# EAGLE board 14043-sparkfun-mlx90640-qwiic-breakout-Panel (EAGLE 9.1.0), part 1 of 3
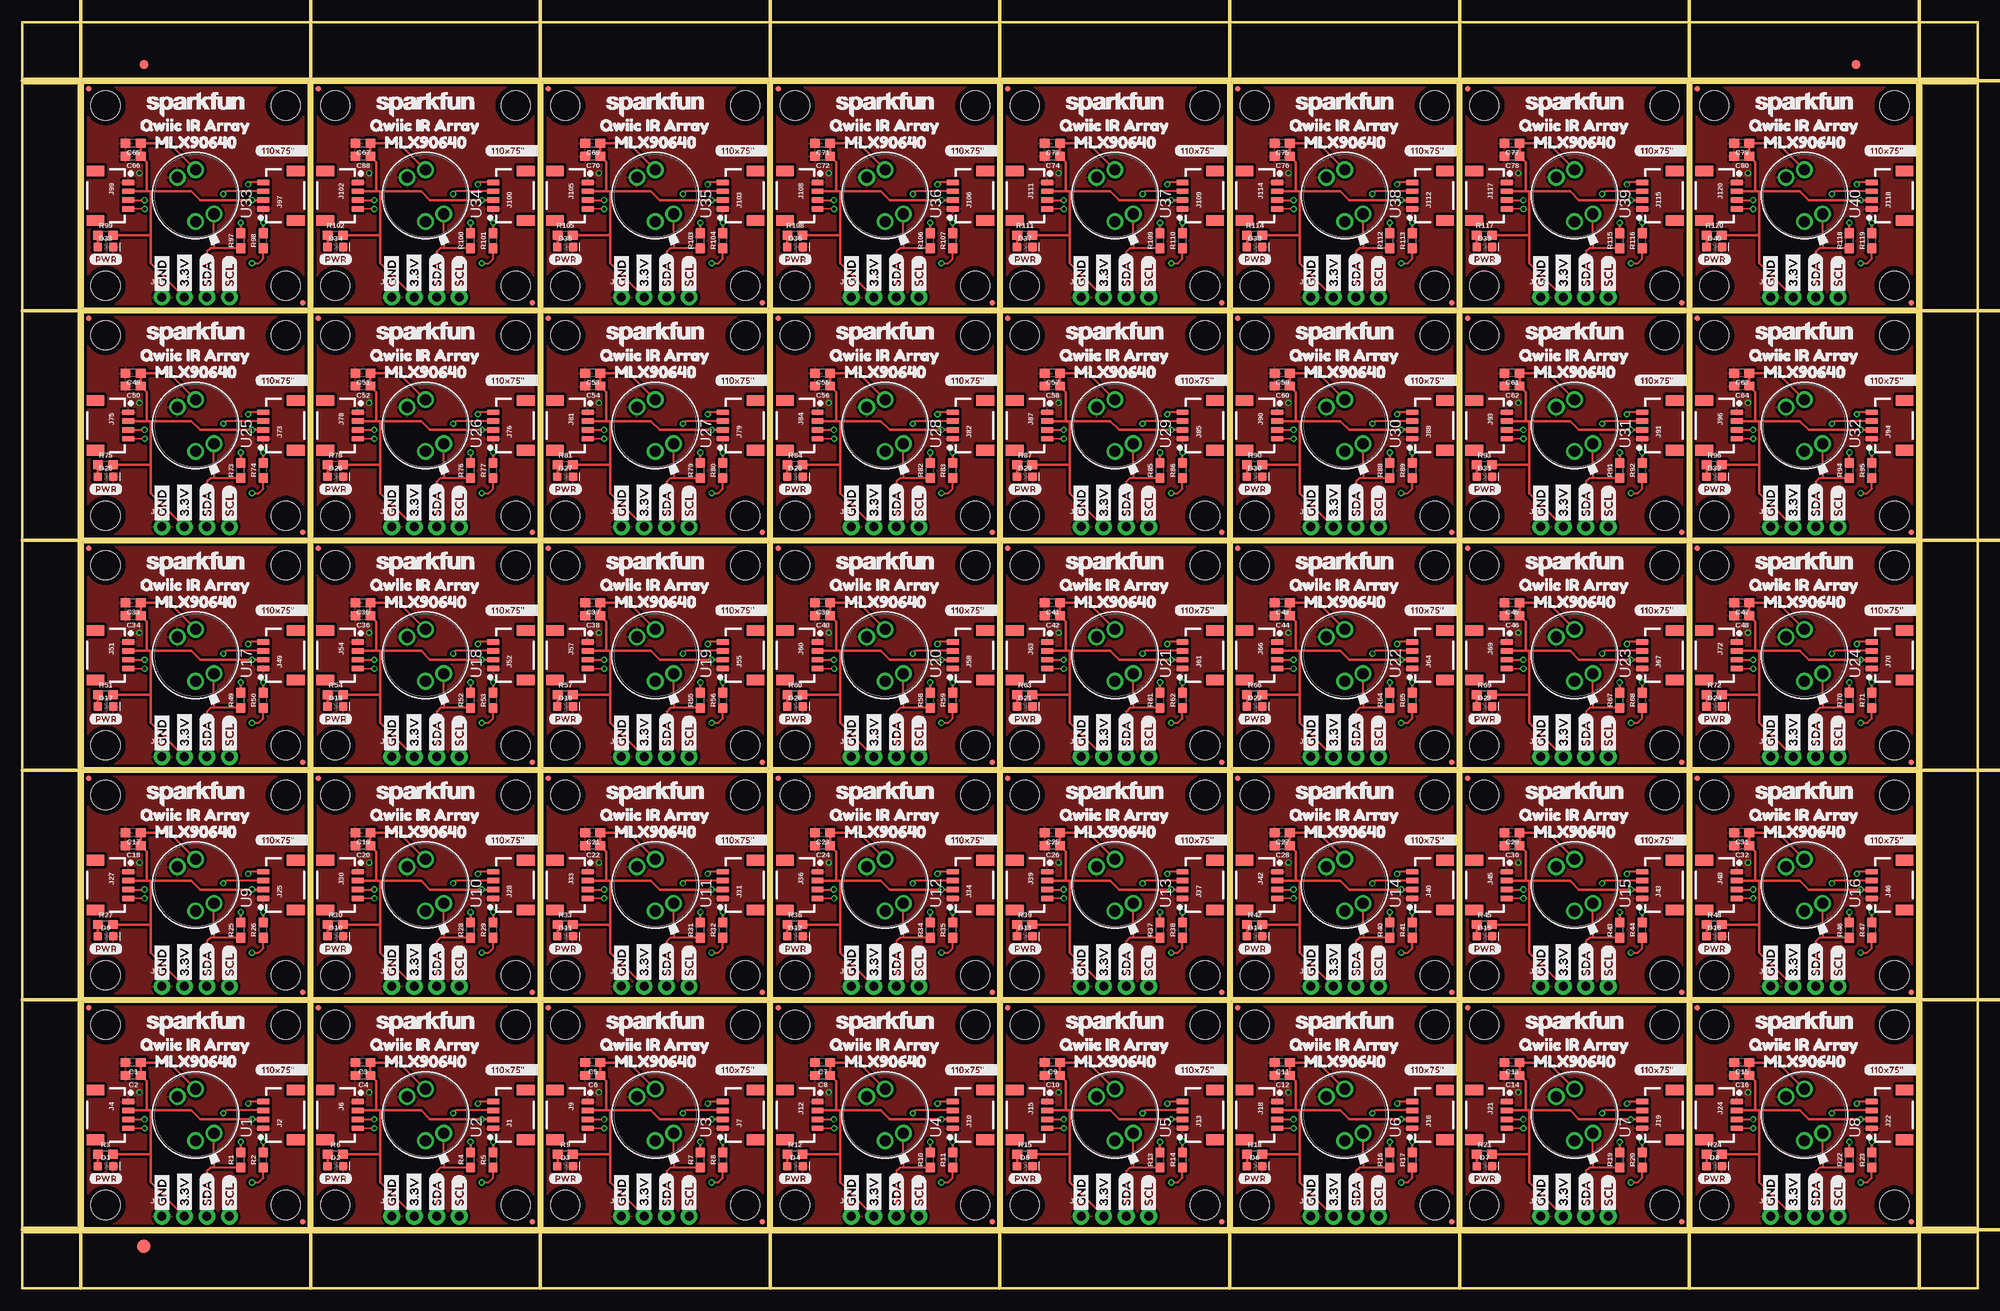
[diagram p0: board, top side]
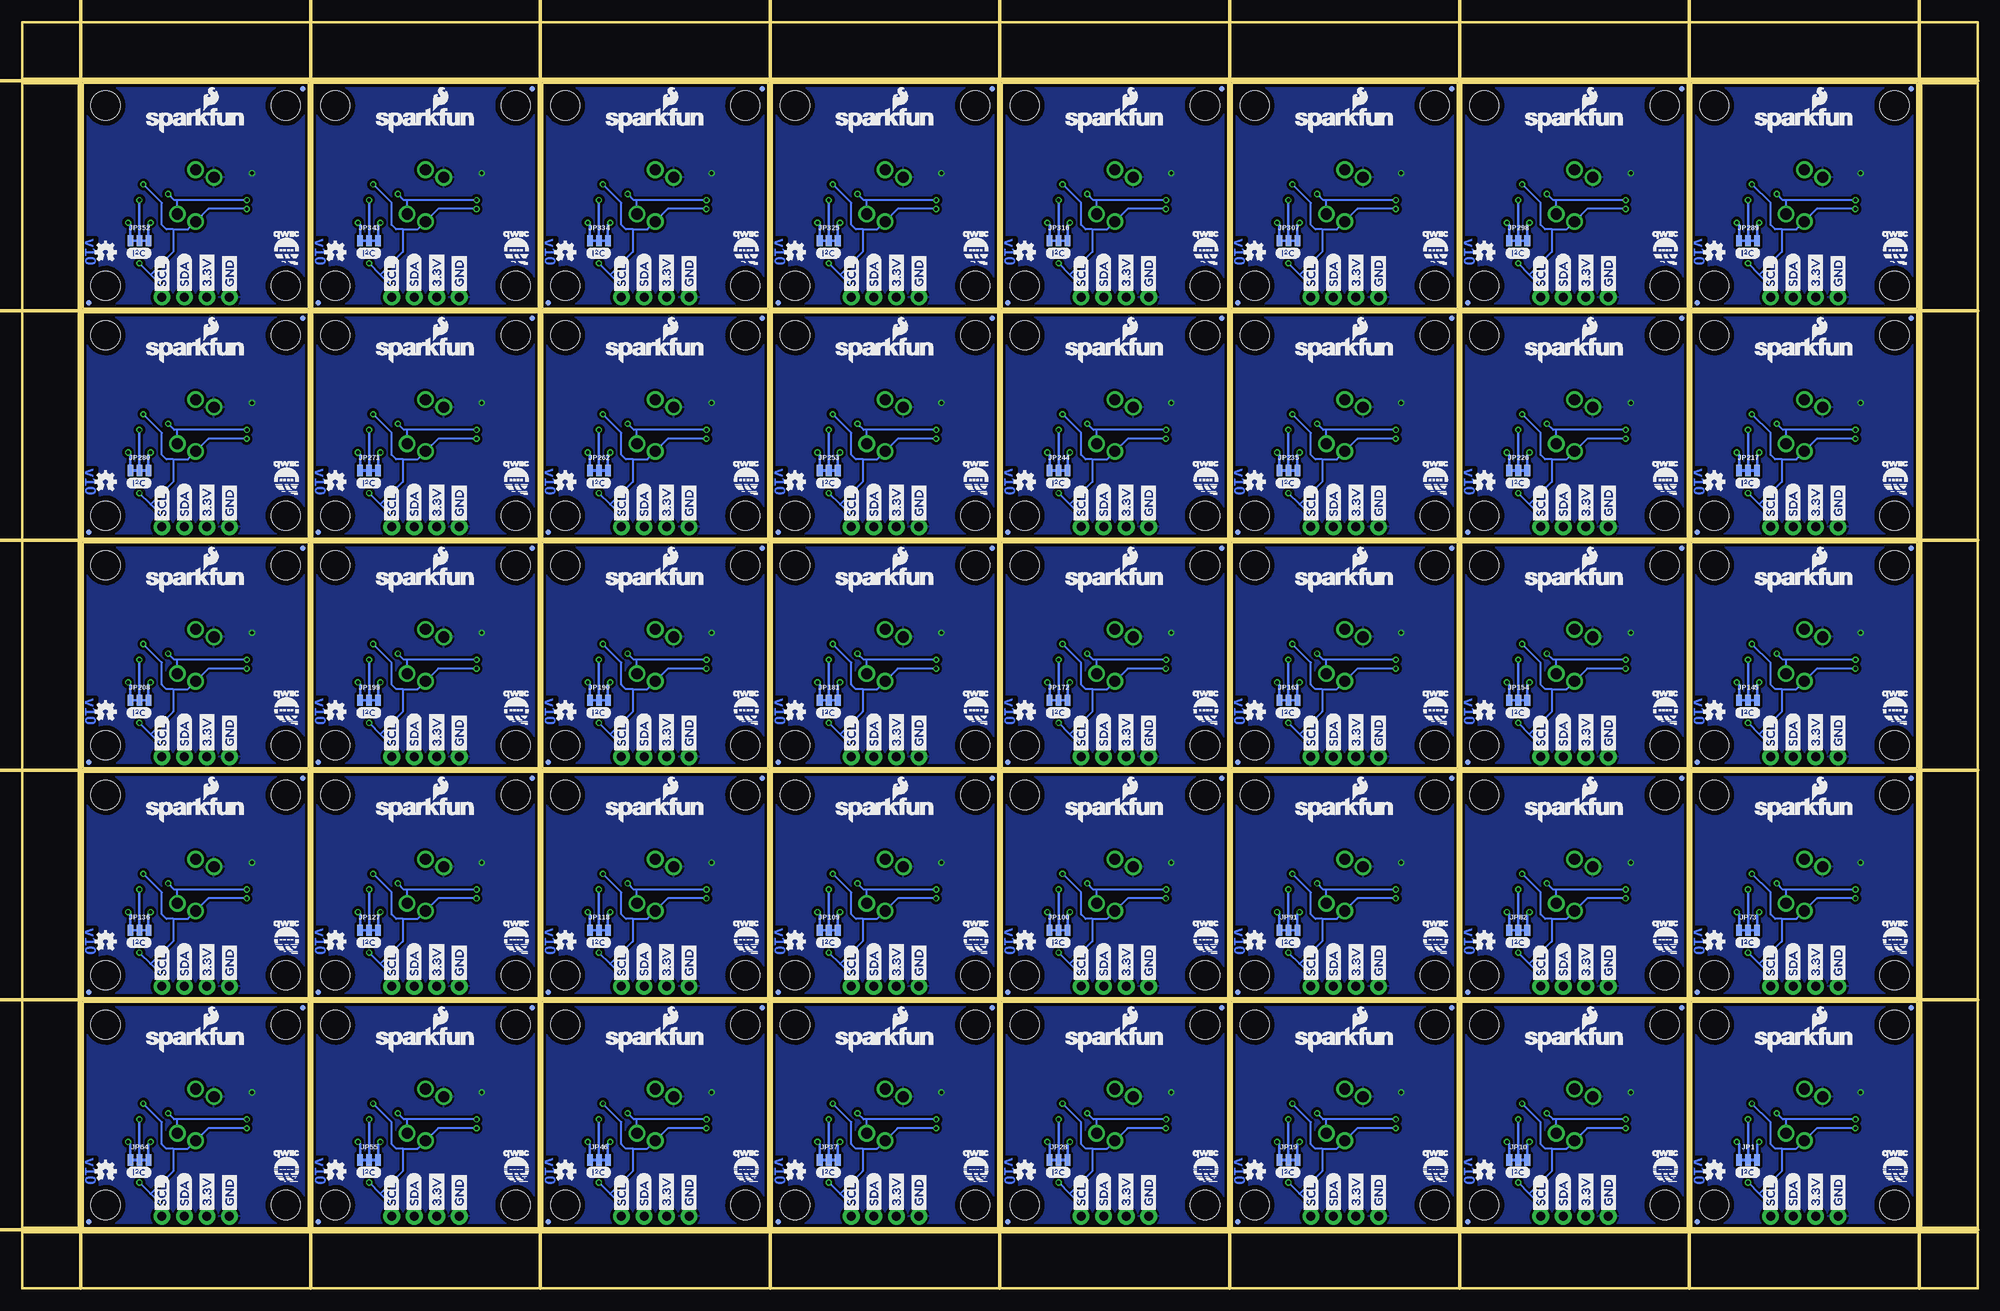
[diagram p1: board, bottom side, seen from below]

Size 220.47 x 142.75 mm. Coordinates in mm from the lower left corner, seen from the top.
Outline: 6.86,6.86 32.26,6.86 32.26,32.26 6.86,32.26 6.86,6.86
Outline: 32.77,6.86 58.17,6.86 58.17,32.26 32.77,32.26 32.77,6.86
Outline: 58.67,6.86 84.07,6.86 84.07,32.26 58.67,32.26 58.67,6.86
Outline: 84.58,6.86 109.98,6.86 109.98,32.26 84.58,32.26 84.58,6.86
Outline: 110.49,6.86 135.89,6.86 135.89,32.26 110.49,32.26 110.49,6.86
Outline: 136.4,6.86 161.8,6.86 161.8,32.26 136.4,32.26 136.4,6.86
Outline: 162.31,6.86 187.71,6.86 187.71,32.26 162.31,32.26 162.31,6.86
Outline: 188.21,6.86 213.61,6.86 213.61,32.26 188.21,32.26 188.21,6.86
Outline: 6.86,32.77 32.26,32.77 32.26,58.17 6.86,58.17 6.86,32.77
Outline: 32.77,32.77 58.17,32.77 58.17,58.17 32.77,58.17 32.77,32.77
Outline: 58.67,32.77 84.07,32.77 84.07,58.17 58.67,58.17 58.67,32.77
Outline: 84.58,32.77 109.98,32.77 109.98,58.17 84.58,58.17 84.58,32.77
Outline: 110.49,32.77 135.89,32.77 135.89,58.17 110.49,58.17 110.49,32.77
Outline: 136.4,32.77 161.8,32.77 161.8,58.17 136.4,58.17 136.4,32.77
Outline: 162.31,32.77 187.71,32.77 187.71,58.17 162.31,58.17 162.31,32.77
Outline: 188.21,32.77 213.61,32.77 213.61,58.17 188.21,58.17 188.21,32.77
Outline: 6.86,58.67 32.26,58.67 32.26,84.07 6.86,84.07 6.86,58.67
Outline: 32.77,58.67 58.17,58.67 58.17,84.07 32.77,84.07 32.77,58.67
Outline: 58.67,58.67 84.07,58.67 84.07,84.07 58.67,84.07 58.67,58.67
Outline: 84.58,58.67 109.98,58.67 109.98,84.07 84.58,84.07 84.58,58.67
Outline: 110.49,58.67 135.89,58.67 135.89,84.07 110.49,84.07 110.49,58.67
Outline: 136.4,58.67 161.8,58.67 161.8,84.07 136.4,84.07 136.4,58.67
Outline: 162.31,58.67 187.71,58.67 187.71,84.07 162.31,84.07 162.31,58.67
Outline: 188.21,58.67 213.61,58.67 213.61,84.07 188.21,84.07 188.21,58.67
Outline: 6.86,84.58 32.26,84.58 32.26,109.98 6.86,109.98 6.86,84.58
Outline: 32.77,84.58 58.17,84.58 58.17,109.98 32.77,109.98 32.77,84.58
Outline: 58.67,84.58 84.07,84.58 84.07,109.98 58.67,109.98 58.67,84.58
Outline: 84.58,84.58 109.98,84.58 109.98,109.98 84.58,109.98 84.58,84.58
Outline: 110.49,84.58 135.89,84.58 135.89,109.98 110.49,109.98 110.49,84.58
Outline: 136.4,84.58 161.8,84.58 161.8,109.98 136.4,109.98 136.4,84.58
Outline: 162.31,84.58 187.71,84.58 187.71,109.98 162.31,109.98 162.31,84.58
Outline: 188.21,84.58 213.61,84.58 213.61,109.98 188.21,109.98 188.21,84.58
Outline: 6.86,110.49 32.26,110.49 32.26,135.89 6.86,135.89 6.86,110.49
Outline: 32.77,110.49 58.17,110.49 58.17,135.89 32.77,135.89 32.77,110.49
Outline: 58.67,110.49 84.07,110.49 84.07,135.89 58.67,135.89 58.67,110.49
Outline: 84.58,110.49 109.98,110.49 109.98,135.89 84.58,135.89 84.58,110.49
Outline: 110.49,110.49 135.89,110.49 135.89,135.89 110.49,135.89 110.49,110.49
Outline: 136.4,110.49 161.8,110.49 161.8,135.89 136.4,135.89 136.4,110.49
Outline: 162.31,110.49 187.71,110.49 187.71,135.89 162.31,135.89 162.31,110.49
Outline: 188.21,110.49 213.61,110.49 213.61,135.89 188.21,135.89 188.21,110.49
Outline: 0,6.35 220.47,6.35 220.47,0 0,0 0,6.35
Outline: 214.12,135.89 220.47,135.89 220.47,6.86 214.12,6.86 214.12,135.89
Outline: 0,142.75 220.47,142.75 220.47,136.4 0,136.4 0,142.75
Outline: 0,135.89 6.35,135.89 6.35,6.86 0,6.86 0,135.89
Copper layers (1*16): Top 0.035mm / dielectric 1.5mm / Bottom 0.035mm
Design rules "SparkFun-2-layer-PCBWay-LIMIT": minimum track width 6mil, minimum drill 0.3mm, track to track 6mil, track to pad 6mil, pad to pad 6mil, via to via 6mil, smd to smd 6mil, copper to edge 6mil, drill to drill 6mil, minimum pad ring 6mil, minimum via ring 6mil, stop-mask expansion 4mil, vias tented up to drill 25mil, thermal gap 10mil
Milling: 15 lines

## Footprints (pad centres in the part's own frame; a part is rotated, then mirrored left to right if it is on the bottom)
0603 = smd 1.1 x 1: 1 -0.85,0; 2 0.85,0
LED-0603 = smd 1 x 1: A -0.877,0; C 0.877,0
FIDUCIAL-1X2 = smd 1 x 1: 1 0,0
FIDUCIAL-1.5X3 = smd 1.5 x 1.5: 1 0,0
1X04_1MM_RA = smd 0.6 x 1.35: 1 -1.5,0; 2 -0.5,0; 3 0.5,0; 4 1.5,0 | smd 1.2 x 2: NC1 2.8,-3.675; NC2 -2.8,-3.675
1X04_NO_SILK = drill 1.016 pad 1.88: 1 0,0; 2 2.54,0; 3 5.08,0; 4 7.62,0
SMT-JUMPER_3_2-NC_TRACE_NO-SILK = smd 0.635 x 1.27: 1 -1.016,0; 2 0,0; 3 1.016,0
MICRO-FIDUCIAL = smd 0.635 x 0.635: 1 0,0
STAND-OFF = hole 3.302: 0,0
MLX90540_MLX90640 = drill 1.25: GND 2.065,2.065; SCL -2.92,0; SDA -2.065,-2.065; VDD 2.92,0

## Placement (x,y rotation side)
C1  0.1uF  [0603]  12.51,25.46 180 top
C2  1.0uF  [0603]  12.51,24 180 top
C3  0.1uF  [0603]  38.42,25.46 180 top
C4  1.0uF  [0603]  38.42,24 180 top
C5  0.1uF  [0603]  64.33,25.46 180 top
C6  1.0uF  [0603]  64.33,24 180 top
C7  0.1uF  [0603]  90.23,25.46 180 top
C8  1.0uF  [0603]  90.23,24 180 top
C9  0.1uF  [0603]  116.14,25.46 180 top
C10  1.0uF  [0603]  116.14,24 180 top
C11  0.1uF  [0603]  142.05,25.46 180 top
C12  1.0uF  [0603]  142.05,24 180 top
C13  0.1uF  [0603]  167.96,25.46 180 top
C14  1.0uF  [0603]  167.96,24 180 top
C15  0.1uF  [0603]  193.87,25.46 180 top
C16  1.0uF  [0603]  193.87,24 180 top
C17  0.1uF  [0603]  12.51,51.37 180 top
C18  1.0uF  [0603]  12.51,49.91 180 top
C19  0.1uF  [0603]  38.42,51.37 180 top
C20  1.0uF  [0603]  38.42,49.91 180 top
C21  0.1uF  [0603]  64.33,51.37 180 top
C22  1.0uF  [0603]  64.33,49.91 180 top
C23  0.1uF  [0603]  90.23,51.37 180 top
C24  1.0uF  [0603]  90.23,49.91 180 top
C25  0.1uF  [0603]  116.14,51.37 180 top
C26  1.0uF  [0603]  116.14,49.91 180 top
C27  0.1uF  [0603]  142.05,51.37 180 top
C28  1.0uF  [0603]  142.05,49.91 180 top
C29  0.1uF  [0603]  167.96,51.37 180 top
C30  1.0uF  [0603]  167.96,49.91 180 top
C31  0.1uF  [0603]  193.87,51.37 180 top
C32  1.0uF  [0603]  193.87,49.91 180 top
C33  0.1uF  [0603]  12.51,77.28 180 top
C34  1.0uF  [0603]  12.51,75.82 180 top
C35  0.1uF  [0603]  38.42,77.28 180 top
C36  1.0uF  [0603]  38.42,75.82 180 top
C37  0.1uF  [0603]  64.33,77.28 180 top
C38  1.0uF  [0603]  64.33,75.82 180 top
C39  0.1uF  [0603]  90.23,77.28 180 top
C40  1.0uF  [0603]  90.23,75.82 180 top
C41  0.1uF  [0603]  116.14,77.28 180 top
C42  1.0uF  [0603]  116.14,75.82 180 top
C43  0.1uF  [0603]  142.05,77.28 180 top
C44  1.0uF  [0603]  142.05,75.82 180 top
C45  0.1uF  [0603]  167.96,77.28 180 top
C46  1.0uF  [0603]  167.96,75.82 180 top
C47  0.1uF  [0603]  193.87,77.28 180 top
C48  1.0uF  [0603]  193.87,75.82 180 top
C49  0.1uF  [0603]  12.51,103.19 180 top
C50  1.0uF  [0603]  12.51,101.73 180 top
C51  0.1uF  [0603]  38.42,103.19 180 top
C52  1.0uF  [0603]  38.42,101.73 180 top
C53  0.1uF  [0603]  64.33,103.19 180 top
C54  1.0uF  [0603]  64.33,101.73 180 top
C55  0.1uF  [0603]  90.23,103.19 180 top
C56  1.0uF  [0603]  90.23,101.73 180 top
C57  0.1uF  [0603]  116.14,103.19 180 top
C58  1.0uF  [0603]  116.14,101.73 180 top
C59  0.1uF  [0603]  142.05,103.19 180 top
C60  1.0uF  [0603]  142.05,101.73 180 top
C61  0.1uF  [0603]  167.96,103.19 180 top
C62  1.0uF  [0603]  167.96,101.73 180 top
C63  0.1uF  [0603]  193.87,103.19 180 top
C64  1.0uF  [0603]  193.87,101.73 180 top
C65  0.1uF  [0603]  12.51,129.1 180 top
C66  1.0uF  [0603]  12.51,127.64 180 top
C67  0.1uF  [0603]  38.42,129.1 180 top
C68  1.0uF  [0603]  38.42,127.64 180 top
C69  0.1uF  [0603]  64.33,129.1 180 top
C70  1.0uF  [0603]  64.33,127.64 180 top
C71  0.1uF  [0603]  90.23,129.1 180 top
C72  1.0uF  [0603]  90.23,127.64 180 top
C73  0.1uF  [0603]  116.14,129.1 180 top
C74  1.0uF  [0603]  116.14,127.64 180 top
C75  0.1uF  [0603]  142.05,129.1 180 top
C76  1.0uF  [0603]  142.05,127.64 180 top
C77  0.1uF  [0603]  167.96,129.1 180 top
C78  1.0uF  [0603]  167.96,127.64 180 top
C79  0.1uF  [0603]  193.87,129.1 180 top
C80  1.0uF  [0603]  193.87,127.64 180 top
D1  RED  [LED-0603]  9.4,13.78 0 top
D2  RED  [LED-0603]  35.31,13.78 0 top
D3  RED  [LED-0603]  61.21,13.78 0 top
D4  RED  [LED-0603]  87.12,13.78 0 top
D5  RED  [LED-0603]  113.03,13.78 0 top
D6  RED  [LED-0603]  138.94,13.78 0 top
D7  RED  [LED-0603]  164.85,13.78 0 top
D8  RED  [LED-0603]  190.75,13.78 0 top
D9  RED  [LED-0603]  9.4,39.69 0 top
D10  RED  [LED-0603]  35.31,39.69 0 top
D11  RED  [LED-0603]  61.21,39.69 0 top
D12  RED  [LED-0603]  87.12,39.69 0 top
D13  RED  [LED-0603]  113.03,39.69 0 top
D14  RED  [LED-0603]  138.94,39.69 0 top
D15  RED  [LED-0603]  164.85,39.69 0 top
D16  RED  [LED-0603]  190.75,39.69 0 top
D17  RED  [LED-0603]  9.4,65.6 0 top
D18  RED  [LED-0603]  35.31,65.6 0 top
D19  RED  [LED-0603]  61.21,65.6 0 top
D20  RED  [LED-0603]  87.12,65.6 0 top
D21  RED  [LED-0603]  113.03,65.6 0 top
D22  RED  [LED-0603]  138.94,65.6 0 top
D23  RED  [LED-0603]  164.85,65.6 0 top
D24  RED  [LED-0603]  190.75,65.6 0 top
D25  RED  [LED-0603]  9.4,91.5 0 top
D26  RED  [LED-0603]  35.31,91.5 0 top
D27  RED  [LED-0603]  61.21,91.5 0 top
D28  RED  [LED-0603]  87.12,91.5 0 top
D29  RED  [LED-0603]  113.03,91.5 0 top
D30  RED  [LED-0603]  138.94,91.5 0 top
D31  RED  [LED-0603]  164.85,91.5 0 top
D32  RED  [LED-0603]  190.75,91.5 0 top
D33  RED  [LED-0603]  9.4,117.41 0 top
D34  RED  [LED-0603]  35.31,117.41 0 top
D35  RED  [LED-0603]  61.21,117.41 0 top
D36  RED  [LED-0603]  87.12,117.41 0 top
D37  RED  [LED-0603]  113.03,117.41 0 top
D38  RED  [LED-0603]  138.94,117.41 0 top
D39  RED  [LED-0603]  164.85,117.41 0 top
D40  RED  [LED-0603]  190.75,117.41 0 top
E$1  [FIDUCIAL-1X2]  13.72,137.99 0 top
E$2  [FIDUCIAL-1X2]  206.76,137.99 0 top
E$3  [FIDUCIAL-1.5X3]  13.72,4.76 0 top
J1  [1X04_1MM_RA]  53.09,19.56 90 top
J2  [1X04_1MM_RA]  27.18,19.56 90 top
J3  PTH  [1X04_NO_SILK]  15.75,8.13 0 top
J4  [1X04_1MM_RA]  11.94,19.56 270 top
J5  PTH  [1X04_NO_SILK]  41.66,8.13 0 top
J6  [1X04_1MM_RA]  37.85,19.56 270 top
J7  [1X04_1MM_RA]  78.99,19.56 90 top
J8  PTH  [1X04_NO_SILK]  67.56,8.13 0 top
J9  [1X04_1MM_RA]  63.75,19.56 270 top
J10  [1X04_1MM_RA]  104.9,19.56 90 top
J11  PTH  [1X04_NO_SILK]  93.47,8.13 0 top
J12  [1X04_1MM_RA]  89.66,19.56 270 top
J13  [1X04_1MM_RA]  130.81,19.56 90 top
J14  PTH  [1X04_NO_SILK]  119.38,8.13 0 top
J15  [1X04_1MM_RA]  115.57,19.56 270 top
J16  [1X04_1MM_RA]  156.72,19.56 90 top
J17  PTH  [1X04_NO_SILK]  145.29,8.13 0 top
J18  [1X04_1MM_RA]  141.48,19.56 270 top
J19  [1X04_1MM_RA]  182.63,19.56 90 top
J20  PTH  [1X04_NO_SILK]  171.2,8.13 0 top
J21  [1X04_1MM_RA]  167.39,19.56 270 top
J22  [1X04_1MM_RA]  208.53,19.56 90 top
J23  PTH  [1X04_NO_SILK]  197.1,8.13 0 top
J24  [1X04_1MM_RA]  193.29,19.56 270 top
J25  [1X04_1MM_RA]  27.18,45.47 90 top
J26  PTH  [1X04_NO_SILK]  15.75,34.04 0 top
J27  [1X04_1MM_RA]  11.94,45.47 270 top
J28  [1X04_1MM_RA]  53.09,45.47 90 top
J29  PTH  [1X04_NO_SILK]  41.66,34.04 0 top
J30  [1X04_1MM_RA]  37.85,45.47 270 top
J31  [1X04_1MM_RA]  78.99,45.47 90 top
J32  PTH  [1X04_NO_SILK]  67.56,34.04 0 top
J33  [1X04_1MM_RA]  63.75,45.47 270 top
J34  [1X04_1MM_RA]  104.9,45.47 90 top
J35  PTH  [1X04_NO_SILK]  93.47,34.04 0 top
J36  [1X04_1MM_RA]  89.66,45.47 270 top
J37  [1X04_1MM_RA]  130.81,45.47 90 top
J38  PTH  [1X04_NO_SILK]  119.38,34.04 0 top
J39  [1X04_1MM_RA]  115.57,45.47 270 top
J40  [1X04_1MM_RA]  156.72,45.47 90 top
J41  PTH  [1X04_NO_SILK]  145.29,34.04 0 top
J42  [1X04_1MM_RA]  141.48,45.47 270 top
J43  [1X04_1MM_RA]  182.63,45.47 90 top
J44  PTH  [1X04_NO_SILK]  171.2,34.04 0 top
J45  [1X04_1MM_RA]  167.39,45.47 270 top
J46  [1X04_1MM_RA]  208.53,45.47 90 top
J47  PTH  [1X04_NO_SILK]  197.1,34.04 0 top
J48  [1X04_1MM_RA]  193.29,45.47 270 top
J49  [1X04_1MM_RA]  27.18,71.37 90 top
J50  PTH  [1X04_NO_SILK]  15.75,59.94 0 top
J51  [1X04_1MM_RA]  11.94,71.37 270 top
J52  [1X04_1MM_RA]  53.09,71.37 90 top
J53  PTH  [1X04_NO_SILK]  41.66,59.94 0 top
J54  [1X04_1MM_RA]  37.85,71.37 270 top
J55  [1X04_1MM_RA]  78.99,71.37 90 top
J56  PTH  [1X04_NO_SILK]  67.56,59.94 0 top
J57  [1X04_1MM_RA]  63.75,71.37 270 top
J58  [1X04_1MM_RA]  104.9,71.37 90 top
J59  PTH  [1X04_NO_SILK]  93.47,59.94 0 top
J60  [1X04_1MM_RA]  89.66,71.37 270 top
J61  [1X04_1MM_RA]  130.81,71.37 90 top
J62  PTH  [1X04_NO_SILK]  119.38,59.94 0 top
J63  [1X04_1MM_RA]  115.57,71.37 270 top
J64  [1X04_1MM_RA]  156.72,71.37 90 top
J65  PTH  [1X04_NO_SILK]  145.29,59.94 0 top
J66  [1X04_1MM_RA]  141.48,71.37 270 top
J67  [1X04_1MM_RA]  182.63,71.37 90 top
J68  PTH  [1X04_NO_SILK]  171.2,59.94 0 top
J69  [1X04_1MM_RA]  167.39,71.37 270 top
J70  [1X04_1MM_RA]  208.53,71.37 90 top
J71  PTH  [1X04_NO_SILK]  197.1,59.94 0 top
J72  [1X04_1MM_RA]  193.29,71.37 270 top
J73  [1X04_1MM_RA]  27.18,97.28 90 top
J74  PTH  [1X04_NO_SILK]  15.75,85.85 0 top
J75  [1X04_1MM_RA]  11.94,97.28 270 top
J76  [1X04_1MM_RA]  53.09,97.28 90 top
J77  PTH  [1X04_NO_SILK]  41.66,85.85 0 top
J78  [1X04_1MM_RA]  37.85,97.28 270 top
J79  [1X04_1MM_RA]  78.99,97.28 90 top
J80  PTH  [1X04_NO_SILK]  67.56,85.85 0 top
J81  [1X04_1MM_RA]  63.75,97.28 270 top
J82  [1X04_1MM_RA]  104.9,97.28 90 top
J83  PTH  [1X04_NO_SILK]  93.47,85.85 0 top
J84  [1X04_1MM_RA]  89.66,97.28 270 top
J85  [1X04_1MM_RA]  130.81,97.28 90 top
J86  PTH  [1X04_NO_SILK]  119.38,85.85 0 top
J87  [1X04_1MM_RA]  115.57,97.28 270 top
J88  [1X04_1MM_RA]  156.72,97.28 90 top
J89  PTH  [1X04_NO_SILK]  145.29,85.85 0 top
J90  [1X04_1MM_RA]  141.48,97.28 270 top
J91  [1X04_1MM_RA]  182.63,97.28 90 top
J92  PTH  [1X04_NO_SILK]  171.2,85.85 0 top
J93  [1X04_1MM_RA]  167.39,97.28 270 top
J94  [1X04_1MM_RA]  208.53,97.28 90 top
J95  PTH  [1X04_NO_SILK]  197.1,85.85 0 top
J96  [1X04_1MM_RA]  193.29,97.28 270 top
J97  [1X04_1MM_RA]  27.18,123.19 90 top
J98  PTH  [1X04_NO_SILK]  15.75,111.76 0 top
J99  [1X04_1MM_RA]  11.94,123.19 270 top
J100  [1X04_1MM_RA]  53.09,123.19 90 top
J101  PTH  [1X04_NO_SILK]  41.66,111.76 0 top
J102  [1X04_1MM_RA]  37.85,123.19 270 top
J103  [1X04_1MM_RA]  78.99,123.19 90 top
J104  PTH  [1X04_NO_SILK]  67.56,111.76 0 top
J105  [1X04_1MM_RA]  63.75,123.19 270 top
J106  [1X04_1MM_RA]  104.9,123.19 90 top
J107  PTH  [1X04_NO_SILK]  93.47,111.76 0 top
J108  [1X04_1MM_RA]  89.66,123.19 270 top
J109  [1X04_1MM_RA]  130.81,123.19 90 top
J110  PTH  [1X04_NO_SILK]  119.38,111.76 0 top
J111  [1X04_1MM_RA]  115.57,123.19 270 top
J112  [1X04_1MM_RA]  156.72,123.19 90 top
J113  PTH  [1X04_NO_SILK]  145.29,111.76 0 top
J114  [1X04_1MM_RA]  141.48,123.19 270 top
J115  [1X04_1MM_RA]  182.63,123.19 90 top
J116  PTH  [1X04_NO_SILK]  171.2,111.76 0 top
J117  [1X04_1MM_RA]  167.39,123.19 270 top
J118  [1X04_1MM_RA]  208.53,123.19 90 top
J119  PTH  [1X04_NO_SILK]  197.1,111.76 0 top
J120  [1X04_1MM_RA]  193.29,123.19 270 top
JP1  I2C  [SMT-JUMPER_3_2-NC_TRACE_NO-SILK]  25.91,14.48 0 bottom
JP2  FIDUCIALUFIDUCIAL  [MICRO-FIDUCIAL]  31.62,7.49 0 top
JP3  STAND-OFF  [STAND-OFF]  9.4,29.72 0 top
JP4  STAND-OFF  [STAND-OFF]  29.72,29.72 0 top
JP5  FIDUCIALUFIDUCIAL  [MICRO-FIDUCIAL]  7.49,31.62 0 top
JP6  FIDUCIALUFIDUCIAL  [MICRO-FIDUCIAL]  31.62,7.49 0 bottom
JP7  FIDUCIALUFIDUCIAL  [MICRO-FIDUCIAL]  7.49,31.62 0 bottom
JP8  STAND-OFF  [STAND-OFF]  9.4,9.4 0 top
JP9  STAND-OFF  [STAND-OFF]  29.72,9.4 0 top
JP10  I2C  [SMT-JUMPER_3_2-NC_TRACE_NO-SILK]  51.82,14.48 0 bottom
JP11  STAND-OFF  [STAND-OFF]  35.31,29.72 0 top
JP12  STAND-OFF  [STAND-OFF]  55.63,29.72 0 top
JP13  FIDUCIALUFIDUCIAL  [MICRO-FIDUCIAL]  57.53,7.49 0 top
JP14  FIDUCIALUFIDUCIAL  [MICRO-FIDUCIAL]  57.53,7.49 0 bottom
JP15  FIDUCIALUFIDUCIAL  [MICRO-FIDUCIAL]  33.4,31.62 0 top
JP16  FIDUCIALUFIDUCIAL  [MICRO-FIDUCIAL]  33.4,31.62 0 bottom
JP17  STAND-OFF  [STAND-OFF]  35.31,9.4 0 top
JP18  STAND-OFF  [STAND-OFF]  55.63,9.4 0 top
JP19  I2C  [SMT-JUMPER_3_2-NC_TRACE_NO-SILK]  77.72,14.48 0 bottom
JP20  STAND-OFF  [STAND-OFF]  61.21,29.72 0 top
JP21  STAND-OFF  [STAND-OFF]  81.53,29.72 0 top
JP22  FIDUCIALUFIDUCIAL  [MICRO-FIDUCIAL]  83.44,7.49 0 top
JP23  FIDUCIALUFIDUCIAL  [MICRO-FIDUCIAL]  83.44,7.49 0 bottom
JP24  FIDUCIALUFIDUCIAL  [MICRO-FIDUCIAL]  59.31,31.62 0 top
JP25  FIDUCIALUFIDUCIAL  [MICRO-FIDUCIAL]  59.31,31.62 0 bottom
JP26  STAND-OFF  [STAND-OFF]  61.21,9.4 0 top
JP27  STAND-OFF  [STAND-OFF]  81.53,9.4 0 top
JP28  I2C  [SMT-JUMPER_3_2-NC_TRACE_NO-SILK]  103.63,14.48 0 bottom
JP29  STAND-OFF  [STAND-OFF]  87.12,29.72 0 top
JP30  STAND-OFF  [STAND-OFF]  107.44,29.72 0 top
JP31  FIDUCIALUFIDUCIAL  [MICRO-FIDUCIAL]  109.35,7.49 0 top
JP32  FIDUCIALUFIDUCIAL  [MICRO-FIDUCIAL]  109.35,7.49 0 bottom
JP33  FIDUCIALUFIDUCIAL  [MICRO-FIDUCIAL]  85.22,31.62 0 top
JP34  FIDUCIALUFIDUCIAL  [MICRO-FIDUCIAL]  85.22,31.62 0 bottom
JP35  STAND-OFF  [STAND-OFF]  87.12,9.4 0 top
JP36  STAND-OFF  [STAND-OFF]  107.44,9.4 0 top
JP37  I2C  [SMT-JUMPER_3_2-NC_TRACE_NO-SILK]  129.54,14.48 0 bottom
JP38  STAND-OFF  [STAND-OFF]  113.03,29.72 0 top
JP39  STAND-OFF  [STAND-OFF]  133.35,29.72 0 top
JP40  FIDUCIALUFIDUCIAL  [MICRO-FIDUCIAL]  135.25,7.49 0 top
JP41  FIDUCIALUFIDUCIAL  [MICRO-FIDUCIAL]  135.25,7.49 0 bottom
JP42  FIDUCIALUFIDUCIAL  [MICRO-FIDUCIAL]  111.12,31.62 0 top
JP43  FIDUCIALUFIDUCIAL  [MICRO-FIDUCIAL]  111.12,31.62 0 bottom
JP44  STAND-OFF  [STAND-OFF]  113.03,9.4 0 top
JP45  STAND-OFF  [STAND-OFF]  133.35,9.4 0 top
JP46  I2C  [SMT-JUMPER_3_2-NC_TRACE_NO-SILK]  155.45,14.48 0 bottom
JP47  STAND-OFF  [STAND-OFF]  138.94,29.72 0 top
JP48  STAND-OFF  [STAND-OFF]  159.26,29.72 0 top
JP49  FIDUCIALUFIDUCIAL  [MICRO-FIDUCIAL]  161.16,7.49 0 top
JP50  FIDUCIALUFIDUCIAL  [MICRO-FIDUCIAL]  161.16,7.49 0 bottom
JP51  FIDUCIALUFIDUCIAL  [MICRO-FIDUCIAL]  137.03,31.62 0 top
JP52  FIDUCIALUFIDUCIAL  [MICRO-FIDUCIAL]  137.03,31.62 0 bottom
JP53  STAND-OFF  [STAND-OFF]  138.94,9.4 0 top
JP54  STAND-OFF  [STAND-OFF]  159.26,9.4 0 top
JP55  I2C  [SMT-JUMPER_3_2-NC_TRACE_NO-SILK]  181.36,14.48 0 bottom
JP56  STAND-OFF  [STAND-OFF]  164.85,29.72 0 top
JP57  STAND-OFF  [STAND-OFF]  185.17,29.72 0 top
JP58  FIDUCIALUFIDUCIAL  [MICRO-FIDUCIAL]  187.07,7.49 0 top
JP59  FIDUCIALUFIDUCIAL  [MICRO-FIDUCIAL]  187.07,7.49 0 bottom
JP60  FIDUCIALUFIDUCIAL  [MICRO-FIDUCIAL]  162.94,31.62 0 top
JP61  FIDUCIALUFIDUCIAL  [MICRO-FIDUCIAL]  162.94,31.62 0 bottom
JP62  STAND-OFF  [STAND-OFF]  164.85,9.4 0 top
JP63  STAND-OFF  [STAND-OFF]  185.17,9.4 0 top
JP64  I2C  [SMT-JUMPER_3_2-NC_TRACE_NO-SILK]  207.26,14.48 0 bottom
JP65  STAND-OFF  [STAND-OFF]  190.75,29.72 0 top
JP66  STAND-OFF  [STAND-OFF]  211.07,29.72 0 top
JP67  FIDUCIALUFIDUCIAL  [MICRO-FIDUCIAL]  212.98,7.49 0 top
JP68  FIDUCIALUFIDUCIAL  [MICRO-FIDUCIAL]  212.98,7.49 0 bottom
JP69  FIDUCIALUFIDUCIAL  [MICRO-FIDUCIAL]  188.85,31.62 0 top
JP70  FIDUCIALUFIDUCIAL  [MICRO-FIDUCIAL]  188.85,31.62 0 bottom
JP71  STAND-OFF  [STAND-OFF]  190.75,9.4 0 top
JP72  STAND-OFF  [STAND-OFF]  211.07,9.4 0 top
JP73  I2C  [SMT-JUMPER_3_2-NC_TRACE_NO-SILK]  25.91,40.39 0 bottom
JP74  STAND-OFF  [STAND-OFF]  9.4,55.63 0 top
JP75  STAND-OFF  [STAND-OFF]  29.72,55.63 0 top
JP76  FIDUCIALUFIDUCIAL  [MICRO-FIDUCIAL]  31.62,33.4 0 top
JP77  FIDUCIALUFIDUCIAL  [MICRO-FIDUCIAL]  31.62,33.4 0 bottom
JP78  FIDUCIALUFIDUCIAL  [MICRO-FIDUCIAL]  7.49,57.53 0 top
JP79  FIDUCIALUFIDUCIAL  [MICRO-FIDUCIAL]  7.49,57.53 0 bottom
JP80  STAND-OFF  [STAND-OFF]  9.4,35.31 0 top
JP81  STAND-OFF  [STAND-OFF]  29.72,35.31 0 top
JP82  I2C  [SMT-JUMPER_3_2-NC_TRACE_NO-SILK]  51.82,40.39 0 bottom
JP83  STAND-OFF  [STAND-OFF]  35.31,55.63 0 top
JP84  STAND-OFF  [STAND-OFF]  55.63,55.63 0 top
JP85  FIDUCIALUFIDUCIAL  [MICRO-FIDUCIAL]  57.53,33.4 0 top
JP86  FIDUCIALUFIDUCIAL  [MICRO-FIDUCIAL]  57.53,33.4 0 bottom
JP87  FIDUCIALUFIDUCIAL  [MICRO-FIDUCIAL]  33.4,57.53 0 top
JP88  FIDUCIALUFIDUCIAL  [MICRO-FIDUCIAL]  33.4,57.53 0 bottom
JP89  STAND-OFF  [STAND-OFF]  35.31,35.31 0 top
JP90  STAND-OFF  [STAND-OFF]  55.63,35.31 0 top
JP91  I2C  [SMT-JUMPER_3_2-NC_TRACE_NO-SILK]  77.72,40.39 0 bottom
JP92  STAND-OFF  [STAND-OFF]  61.21,55.63 0 top
JP93  STAND-OFF  [STAND-OFF]  81.53,55.63 0 top
JP94  FIDUCIALUFIDUCIAL  [MICRO-FIDUCIAL]  83.44,33.4 0 top
JP95  FIDUCIALUFIDUCIAL  [MICRO-FIDUCIAL]  83.44,33.4 0 bottom
JP96  FIDUCIALUFIDUCIAL  [MICRO-FIDUCIAL]  59.31,57.53 0 top
JP97  FIDUCIALUFIDUCIAL  [MICRO-FIDUCIAL]  59.31,57.53 0 bottom
JP98  STAND-OFF  [STAND-OFF]  61.21,35.31 0 top
JP99  STAND-OFF  [STAND-OFF]  81.53,35.31 0 top
JP100  I2C  [SMT-JUMPER_3_2-NC_TRACE_NO-SILK]  103.63,40.39 0 bottom
JP101  STAND-OFF  [STAND-OFF]  87.12,55.63 0 top
JP102  STAND-OFF  [STAND-OFF]  107.44,55.63 0 top
JP103  FIDUCIALUFIDUCIAL  [MICRO-FIDUCIAL]  109.35,33.4 0 top
JP104  FIDUCIALUFIDUCIAL  [MICRO-FIDUCIAL]  109.35,33.4 0 bottom
JP105  FIDUCIALUFIDUCIAL  [MICRO-FIDUCIAL]  85.22,57.53 0 top
JP106  FIDUCIALUFIDUCIAL  [MICRO-FIDUCIAL]  85.22,57.53 0 bottom
JP107  STAND-OFF  [STAND-OFF]  87.12,35.31 0 top
JP108  STAND-OFF  [STAND-OFF]  107.44,35.31 0 top
JP109  I2C  [SMT-JUMPER_3_2-NC_TRACE_NO-SILK]  129.54,40.39 0 bottom
JP110  STAND-OFF  [STAND-OFF]  113.03,55.63 0 top
JP111  STAND-OFF  [STAND-OFF]  133.35,55.63 0 top
JP112  FIDUCIALUFIDUCIAL  [MICRO-FIDUCIAL]  135.25,33.4 0 top
JP113  FIDUCIALUFIDUCIAL  [MICRO-FIDUCIAL]  135.25,33.4 0 bottom
JP114  FIDUCIALUFIDUCIAL  [MICRO-FIDUCIAL]  111.12,57.53 0 top
JP115  FIDUCIALUFIDUCIAL  [MICRO-FIDUCIAL]  111.12,57.53 0 bottom
JP116  STAND-OFF  [STAND-OFF]  113.03,35.31 0 top
JP117  STAND-OFF  [STAND-OFF]  133.35,35.31 0 top
JP118  I2C  [SMT-JUMPER_3_2-NC_TRACE_NO-SILK]  155.45,40.39 0 bottom
JP119  STAND-OFF  [STAND-OFF]  138.94,55.63 0 top
JP120  STAND-OFF  [STAND-OFF]  159.26,55.63 0 top
JP121  FIDUCIALUFIDUCIAL  [MICRO-FIDUCIAL]  161.16,33.4 0 top
JP122  FIDUCIALUFIDUCIAL  [MICRO-FIDUCIAL]  161.16,33.4 0 bottom
JP123  FIDUCIALUFIDUCIAL  [MICRO-FIDUCIAL]  137.03,57.53 0 top
JP124  FIDUCIALUFIDUCIAL  [MICRO-FIDUCIAL]  137.03,57.53 0 bottom
JP125  STAND-OFF  [STAND-OFF]  138.94,35.31 0 top
JP126  STAND-OFF  [STAND-OFF]  159.26,35.31 0 top
JP127  I2C  [SMT-JUMPER_3_2-NC_TRACE_NO-SILK]  181.36,40.39 0 bottom
JP128  STAND-OFF  [STAND-OFF]  164.85,55.63 0 top
JP129  STAND-OFF  [STAND-OFF]  185.17,55.63 0 top
JP130  FIDUCIALUFIDUCIAL  [MICRO-FIDUCIAL]  187.07,33.4 0 top
JP131  FIDUCIALUFIDUCIAL  [MICRO-FIDUCIAL]  187.07,33.4 0 bottom
JP132  FIDUCIALUFIDUCIAL  [MICRO-FIDUCIAL]  162.94,57.53 0 top
JP133  FIDUCIALUFIDUCIAL  [MICRO-FIDUCIAL]  162.94,57.53 0 bottom
JP134  STAND-OFF  [STAND-OFF]  164.85,35.31 0 top
JP135  STAND-OFF  [STAND-OFF]  185.17,35.31 0 top
JP136  I2C  [SMT-JUMPER_3_2-NC_TRACE_NO-SILK]  207.26,40.39 0 bottom
JP137  STAND-OFF  [STAND-OFF]  190.75,55.63 0 top
JP138  STAND-OFF  [STAND-OFF]  211.07,55.63 0 top
JP139  FIDUCIALUFIDUCIAL  [MICRO-FIDUCIAL]  212.98,33.4 0 top
JP140  FIDUCIALUFIDUCIAL  [MICRO-FIDUCIAL]  212.98,33.4 0 bottom
JP141  FIDUCIALUFIDUCIAL  [MICRO-FIDUCIAL]  188.85,57.53 0 top
JP142  FIDUCIALUFIDUCIAL  [MICRO-FIDUCIAL]  188.85,57.53 0 bottom
JP143  STAND-OFF  [STAND-OFF]  190.75,35.31 0 top
JP144  STAND-OFF  [STAND-OFF]  211.07,35.31 0 top
JP145  I2C  [SMT-JUMPER_3_2-NC_TRACE_NO-SILK]  25.91,66.29 0 bottom
JP146  STAND-OFF  [STAND-OFF]  9.4,81.53 0 top
JP147  STAND-OFF  [STAND-OFF]  29.72,81.53 0 top
JP148  FIDUCIALUFIDUCIAL  [MICRO-FIDUCIAL]  31.62,59.31 0 top
JP149  FIDUCIALUFIDUCIAL  [MICRO-FIDUCIAL]  31.62,59.31 0 bottom
JP150  FIDUCIALUFIDUCIAL  [MICRO-FIDUCIAL]  7.49,83.44 0 top
JP151  FIDUCIALUFIDUCIAL  [MICRO-FIDUCIAL]  7.49,83.44 0 bottom
JP152  STAND-OFF  [STAND-OFF]  9.4,61.21 0 top
JP153  STAND-OFF  [STAND-OFF]  29.72,61.21 0 top
JP154  I2C  [SMT-JUMPER_3_2-NC_TRACE_NO-SILK]  51.82,66.29 0 bottom
JP155  STAND-OFF  [STAND-OFF]  35.31,81.53 0 top
JP156  STAND-OFF  [STAND-OFF]  55.63,81.53 0 top
JP157  FIDUCIALUFIDUCIAL  [MICRO-FIDUCIAL]  57.53,59.31 0 top
JP158  FIDUCIALUFIDUCIAL  [MICRO-FIDUCIAL]  57.53,59.31 0 bottom
JP159  FIDUCIALUFIDUCIAL  [MICRO-FIDUCIAL]  33.4,83.44 0 top
JP160  FIDUCIALUFIDUCIAL  [MICRO-FIDUCIAL]  33.4,83.44 0 bottom
JP161  STAND-OFF  [STAND-OFF]  35.31,61.21 0 top
JP162  STAND-OFF  [STAND-OFF]  55.63,61.21 0 top
JP163  I2C  [SMT-JUMPER_3_2-NC_TRACE_NO-SILK]  77.72,66.29 0 bottom
JP164  STAND-OFF  [STAND-OFF]  61.21,81.53 0 top
JP165  STAND-OFF  [STAND-OFF]  81.53,81.53 0 top
JP166  FIDUCIALUFIDUCIAL  [MICRO-FIDUCIAL]  83.44,59.31 0 top
JP167  FIDUCIALUFIDUCIAL  [MICRO-FIDUCIAL]  83.44,59.31 0 bottom
JP168  FIDUCIALUFIDUCIAL  [MICRO-FIDUCIAL]  59.31,83.44 0 top
JP169  FIDUCIALUFIDUCIAL  [MICRO-FIDUCIAL]  59.31,83.44 0 bottom
JP170  STAND-OFF  [STAND-OFF]  61.21,61.21 0 top
JP171  STAND-OFF  [STAND-OFF]  81.53,61.21 0 top
JP172  I2C  [SMT-JUMPER_3_2-NC_TRACE_NO-SILK]  103.63,66.29 0 bottom
JP173  STAND-OFF  [STAND-OFF]  87.12,81.53 0 top
JP174  STAND-OFF  [STAND-OFF]  107.44,81.53 0 top
JP175  FIDUCIALUFIDUCIAL  [MICRO-FIDUCIAL]  109.35,59.31 0 top
JP176  FIDUCIALUFIDUCIAL  [MICRO-FIDUCIAL]  109.35,59.31 0 bottom
JP177  FIDUCIALUFIDUCIAL  [MICRO-FIDUCIAL]  85.22,83.44 0 top
JP178  FIDUCIALUFIDUCIAL  [MICRO-FIDUCIAL]  85.22,83.44 0 bottom
JP179  STAND-OFF  [STAND-OFF]  87.12,61.21 0 top
JP180  STAND-OFF  [STAND-OFF]  107.44,61.21 0 top
JP181  I2C  [SMT-JUMPER_3_2-NC_TRACE_NO-SILK]  129.54,66.29 0 bottom
JP182  STAND-OFF  [STAND-OFF]  113.03,81.53 0 top
JP183  STAND-OFF  [STAND-OFF]  133.35,81.53 0 top
JP184  FIDUCIALUFIDUCIAL  [MICRO-FIDUCIAL]  135.25,59.31 0 top
JP185  FIDUCIALUFIDUCIAL  [MICRO-FIDUCIAL]  135.25,59.31 0 bottom
JP186  FIDUCIALUFIDUCIAL  [MICRO-FIDUCIAL]  111.12,83.44 0 top
JP187  FIDUCIALUFIDUCIAL  [MICRO-FIDUCIAL]  111.12,83.44 0 bottom
JP188  STAND-OFF  [STAND-OFF]  113.03,61.21 0 top
JP189  STAND-OFF  [STAND-OFF]  133.35,61.21 0 top
JP190  I2C  [SMT-JUMPER_3_2-NC_TRACE_NO-SILK]  155.45,66.29 0 bottom
JP191  STAND-OFF  [STAND-OFF]  138.94,81.53 0 top
JP192  STAND-OFF  [STAND-OFF]  159.26,81.53 0 top
JP193  FIDUCIALUFIDUCIAL  [MICRO-FIDUCIAL]  161.16,59.31 0 top
JP194  FIDUCIALUFIDUCIAL  [MICRO-FIDUCIAL]  161.16,59.31 0 bottom
JP195  FIDUCIALUFIDUCIAL  [MICRO-FIDUCIAL]  137.03,83.44 0 top
JP196  FIDUCIALUFIDUCIAL  [MICRO-FIDUCIAL]  137.03,83.44 0 bottom
JP197  STAND-OFF  [STAND-OFF]  138.94,61.21 0 top
JP198  STAND-OFF  [STAND-OFF]  159.26,61.21 0 top
JP199  I2C  [SMT-JUMPER_3_2-NC_TRACE_NO-SILK]  181.36,66.29 0 bottom
JP200  STAND-OFF  [STAND-OFF]  164.85,81.53 0 top
JP201  STAND-OFF  [STAND-OFF]  185.17,81.53 0 top
JP202  FIDUCIALUFIDUCIAL  [MICRO-FIDUCIAL]  187.07,59.31 0 top
JP203  FIDUCIALUFIDUCIAL  [MICRO-FIDUCIAL]  187.07,59.31 0 bottom
JP204  FIDUCIALUFIDUCIAL  [MICRO-FIDUCIAL]  162.94,83.44 0 top
JP205  FIDUCIALUFIDUCIAL  [MICRO-FIDUCIAL]  162.94,83.44 0 bottom
JP206  STAND-OFF  [STAND-OFF]  164.85,61.21 0 top
JP207  STAND-OFF  [STAND-OFF]  185.17,61.21 0 top
JP208  I2C  [SMT-JUMPER_3_2-NC_TRACE_NO-SILK]  207.26,66.29 0 bottom
JP209  STAND-OFF  [STAND-OFF]  190.75,81.53 0 top
JP210  STAND-OFF  [STAND-OFF]  211.07,81.53 0 top
JP211  FIDUCIALUFIDUCIAL  [MICRO-FIDUCIAL]  212.98,59.31 0 top
JP212  FIDUCIALUFIDUCIAL  [MICRO-FIDUCIAL]  212.98,59.31 0 bottom
JP213  FIDUCIALUFIDUCIAL  [MICRO-FIDUCIAL]  188.85,83.44 0 top
JP214  FIDUCIALUFIDUCIAL  [MICRO-FIDUCIAL]  188.85,83.44 0 bottom
JP215  STAND-OFF  [STAND-OFF]  190.75,61.21 0 top
JP216  STAND-OFF  [STAND-OFF]  211.07,61.21 0 top
JP217  I2C  [SMT-JUMPER_3_2-NC_TRACE_NO-SILK]  25.91,92.2 0 bottom
JP218  STAND-OFF  [STAND-OFF]  9.4,107.44 0 top
JP219  STAND-OFF  [STAND-OFF]  29.72,107.44 0 top
JP220  FIDUCIALUFIDUCIAL  [MICRO-FIDUCIAL]  31.62,85.22 0 top
JP221  FIDUCIALUFIDUCIAL  [MICRO-FIDUCIAL]  31.62,85.22 0 bottom
JP222  FIDUCIALUFIDUCIAL  [MICRO-FIDUCIAL]  7.49,109.35 0 top
JP223  FIDUCIALUFIDUCIAL  [MICRO-FIDUCIAL]  7.49,109.35 0 bottom
JP224  STAND-OFF  [STAND-OFF]  9.4,87.12 0 top
JP225  STAND-OFF  [STAND-OFF]  29.72,87.12 0 top
JP226  I2C  [SMT-JUMPER_3_2-NC_TRACE_NO-SILK]  51.82,92.2 0 bottom
JP227  STAND-OFF  [STAND-OFF]  35.31,107.44 0 top
JP228  STAND-OFF  [STAND-OFF]  55.63,107.44 0 top
JP229  FIDUCIALUFIDUCIAL  [MICRO-FIDUCIAL]  57.53,85.22 0 top
JP230  FIDUCIALUFIDUCIAL  [MICRO-FIDUCIAL]  57.53,85.22 0 bottom
JP231  FIDUCIALUFIDUCIAL  [MICRO-FIDUCIAL]  33.4,109.35 0 top
JP232  FIDUCIALUFIDUCIAL  [MICRO-FIDUCIAL]  33.4,109.35 0 bottom
JP233  STAND-OFF  [STAND-OFF]  35.31,87.12 0 top
JP234  STAND-OFF  [STAND-OFF]  55.63,87.12 0 top
JP235  I2C  [SMT-JUMPER_3_2-NC_TRACE_NO-SILK]  77.72,92.2 0 bottom
JP236  STAND-OFF  [STAND-OFF]  61.21,107.44 0 top
JP237  STAND-OFF  [STAND-OFF]  81.53,107.44 0 top
JP238  FIDUCIALUFIDUCIAL  [MICRO-FIDUCIAL]  83.44,85.22 0 top
JP239  FIDUCIALUFIDUCIAL  [MICRO-FIDUCIAL]  83.44,85.22 0 bottom
JP240  FIDUCIALUFIDUCIAL  [MICRO-FIDUCIAL]  59.31,109.35 0 top
JP241  FIDUCIALUFIDUCIAL  [MICRO-FIDUCIAL]  59.31,109.35 0 bottom
JP242  STAND-OFF  [STAND-OFF]  61.21,87.12 0 top
JP243  STAND-OFF  [STAND-OFF]  81.53,87.12 0 top
JP244  I2C  [SMT-JUMPER_3_2-NC_TRACE_NO-SILK]  103.63,92.2 0 bottom
JP245  STAND-OFF  [STAND-OFF]  87.12,107.44 0 top
JP246  STAND-OFF  [STAND-OFF]  107.44,107.44 0 top
JP247  FIDUCIALUFIDUCIAL  [MICRO-FIDUCIAL]  109.35,85.22 0 top
JP248  FIDUCIALUFIDUCIAL  [MICRO-FIDUCIAL]  109.35,85.22 0 bottom
JP249  FIDUCIALUFIDUCIAL  [MICRO-FIDUCIAL]  85.22,109.35 0 top
JP250  FIDUCIALUFIDUCIAL  [MICRO-FIDUCIAL]  85.22,109.35 0 bottom
JP251  STAND-OFF  [STAND-OFF]  87.12,87.12 0 top
JP252  STAND-OFF  [STAND-OFF]  107.44,87.12 0 top
JP253  I2C  [SMT-JUMPER_3_2-NC_TRACE_NO-SILK]  129.54,92.2 0 bottom
JP254  STAND-OFF  [STAND-OFF]  113.03,107.44 0 top
JP255  STAND-OFF  [STAND-OFF]  133.35,107.44 0 top
JP256  FIDUCIALUFIDUCIAL  [MICRO-FIDUCIAL]  135.25,85.22 0 top
JP257  FIDUCIALUFIDUCIAL  [MICRO-FIDUCIAL]  135.25,85.22 0 bottom
JP258  FIDUCIALUFIDUCIAL  [MICRO-FIDUCIAL]  111.12,109.35 0 top
JP259  FIDUCIALUFIDUCIAL  [MICRO-FIDUCIAL]  111.12,109.35 0 bottom
JP260  STAND-OFF  [STAND-OFF]  113.03,87.12 0 top
JP261  STAND-OFF  [STAND-OFF]  133.35,87.12 0 top
JP262  I2C  [SMT-JUMPER_3_2-NC_TRACE_NO-SILK]  155.45,92.2 0 bottom
JP263  STAND-OFF  [STAND-OFF]  138.94,107.44 0 top
JP264  STAND-OFF  [STAND-OFF]  159.26,107.44 0 top
JP265  FIDUCIALUFIDUCIAL  [MICRO-FIDUCIAL]  161.16,85.22 0 top
JP266  FIDUCIALUFIDUCIAL  [MICRO-FIDUCIAL]  161.16,85.22 0 bottom
JP267  FIDUCIALUFIDUCIAL  [MICRO-FIDUCIAL]  137.03,109.35 0 top
JP268  FIDUCIALUFIDUCIAL  [MICRO-FIDUCIAL]  137.03,109.35 0 bottom
JP269  STAND-OFF  [STAND-OFF]  138.94,87.12 0 top
JP270  STAND-OFF  [STAND-OFF]  159.26,87.12 0 top
JP271  I2C  [SMT-JUMPER_3_2-NC_TRACE_NO-SILK]  181.36,92.2 0 bottom
JP272  STAND-OFF  [STAND-OFF]  164.85,107.44 0 top
JP273  STAND-OFF  [STAND-OFF]  185.17,107.44 0 top
JP274  FIDUCIALUFIDUCIAL  [MICRO-FIDUCIAL]  187.07,85.22 0 top
JP275  FIDUCIALUFIDUCIAL  [MICRO-FIDUCIAL]  187.07,85.22 0 bottom
JP276  FIDUCIALUFIDUCIAL  [MICRO-FIDUCIAL]  162.94,109.35 0 top
JP277  FIDUCIALUFIDUCIAL  [MICRO-FIDUCIAL]  162.94,109.35 0 bottom
JP278  STAND-OFF  [STAND-OFF]  164.85,87.12 0 top
JP279  STAND-OFF  [STAND-OFF]  185.17,87.12 0 top
JP280  I2C  [SMT-JUMPER_3_2-NC_TRACE_NO-SILK]  207.26,92.2 0 bottom
JP281  STAND-OFF  [STAND-OFF]  190.75,107.44 0 top
JP282  STAND-OFF  [STAND-OFF]  211.07,107.44 0 top
JP283  FIDUCIALUFIDUCIAL  [MICRO-FIDUCIAL]  212.98,85.22 0 top
JP284  FIDUCIALUFIDUCIAL  [MICRO-FIDUCIAL]  212.98,85.22 0 bottom
JP285  FIDUCIALUFIDUCIAL  [MICRO-FIDUCIAL]  188.85,109.35 0 top
JP286  FIDUCIALUFIDUCIAL  [MICRO-FIDUCIAL]  188.85,109.35 0 bottom
JP287  STAND-OFF  [STAND-OFF]  190.75,87.12 0 top
JP288  STAND-OFF  [STAND-OFF]  211.07,87.12 0 top
JP289  I2C  [SMT-JUMPER_3_2-NC_TRACE_NO-SILK]  25.91,118.11 0 bottom
JP290  STAND-OFF  [STAND-OFF]  9.4,133.35 0 top
JP291  STAND-OFF  [STAND-OFF]  29.72,133.35 0 top
JP292  FIDUCIALUFIDUCIAL  [MICRO-FIDUCIAL]  31.62,111.12 0 top
JP293  FIDUCIALUFIDUCIAL  [MICRO-FIDUCIAL]  31.62,111.12 0 bottom
JP294  FIDUCIALUFIDUCIAL  [MICRO-FIDUCIAL]  7.49,135.25 0 top
JP295  FIDUCIALUFIDUCIAL  [MICRO-FIDUCIAL]  7.49,135.25 0 bottom
JP296  STAND-OFF  [STAND-OFF]  9.4,113.03 0 top
JP297  STAND-OFF  [STAND-OFF]  29.72,113.03 0 top
JP298  I2C  [SMT-JUMPER_3_2-NC_TRACE_NO-SILK]  51.82,118.11 0 bottom
JP299  STAND-OFF  [STAND-OFF]  35.31,133.35 0 top
JP300  STAND-OFF  [STAND-OFF]  55.63,133.35 0 top
JP301  FIDUCIALUFIDUCIAL  [MICRO-FIDUCIAL]  57.53,111.12 0 top
JP302  FIDUCIALUFIDUCIAL  [MICRO-FIDUCIAL]  57.53,111.12 0 bottom
JP303  FIDUCIALUFIDUCIAL  [MICRO-FIDUCIAL]  33.4,135.25 0 top
JP304  FIDUCIALUFIDUCIAL  [MICRO-FIDUCIAL]  33.4,135.25 0 bottom
JP305  STAND-OFF  [STAND-OFF]  35.31,113.03 0 top
JP306  STAND-OFF  [STAND-OFF]  55.63,113.03 0 top
JP307  I2C  [SMT-JUMPER_3_2-NC_TRACE_NO-SILK]  77.72,118.11 0 bottom
JP308  STAND-OFF  [STAND-OFF]  61.21,133.35 0 top
JP309  STAND-OFF  [STAND-OFF]  81.53,133.35 0 top
JP310  FIDUCIALUFIDUCIAL  [MICRO-FIDUCIAL]  83.44,111.12 0 top
JP311  FIDUCIALUFIDUCIAL  [MICRO-FIDUCIAL]  83.44,111.12 0 bottom
JP312  FIDUCIALUFIDUCIAL  [MICRO-FIDUCIAL]  59.31,135.25 0 top
JP313  FIDUCIALUFIDUCIAL  [MICRO-FIDUCIAL]  59.31,135.25 0 bottom
JP314  STAND-OFF  [STAND-OFF]  61.21,113.03 0 top
JP315  STAND-OFF  [STAND-OFF]  81.53,113.03 0 top
JP316  I2C  [SMT-JUMPER_3_2-NC_TRACE_NO-SILK]  103.63,118.11 0 bottom
JP317  STAND-OFF  [STAND-OFF]  87.12,133.35 0 top
JP318  STAND-OFF  [STAND-OFF]  107.44,133.35 0 top
JP319  FIDUCIALUFIDUCIAL  [MICRO-FIDUCIAL]  109.35,111.12 0 top
JP320  FIDUCIALUFIDUCIAL  [MICRO-FIDUCIAL]  109.35,111.12 0 bottom
JP321  FIDUCIALUFIDUCIAL  [MICRO-FIDUCIAL]  85.22,135.25 0 top
JP322  FIDUCIALUFIDUCIAL  [MICRO-FIDUCIAL]  85.22,135.25 0 bottom
JP323  STAND-OFF  [STAND-OFF]  87.12,113.03 0 top
JP324  STAND-OFF  [STAND-OFF]  107.44,113.03 0 top
JP325  I2C  [SMT-JUMPER_3_2-NC_TRACE_NO-SILK]  129.54,118.11 0 bottom
JP326  STAND-OFF  [STAND-OFF]  113.03,133.35 0 top
JP327  STAND-OFF  [STAND-OFF]  133.35,133.35 0 top
JP328  FIDUCIALUFIDUCIAL  [MICRO-FIDUCIAL]  135.25,111.12 0 top
JP329  FIDUCIALUFIDUCIAL  [MICRO-FIDUCIAL]  135.25,111.12 0 bottom
JP330  FIDUCIALUFIDUCIAL  [MICRO-FIDUCIAL]  111.12,135.25 0 top
JP331  FIDUCIALUFIDUCIAL  [MICRO-FIDUCIAL]  111.12,135.25 0 bottom
JP332  STAND-OFF  [STAND-OFF]  113.03,113.03 0 top
JP333  STAND-OFF  [STAND-OFF]  133.35,113.03 0 top
JP334  I2C  [SMT-JUMPER_3_2-NC_TRACE_NO-SILK]  155.45,118.11 0 bottom
JP335  STAND-OFF  [STAND-OFF]  138.94,133.35 0 top
JP336  STAND-OFF  [STAND-OFF]  159.26,133.35 0 top
JP337  FIDUCIALUFIDUCIAL  [MICRO-FIDUCIAL]  161.16,111.12 0 top
JP338  FIDUCIALUFIDUCIAL  [MICRO-FIDUCIAL]  161.16,111.12 0 bottom
JP339  FIDUCIALUFIDUCIAL  [MICRO-FIDUCIAL]  137.03,135.25 0 top
JP340  FIDUCIALUFIDUCIAL  [MICRO-FIDUCIAL]  137.03,135.25 0 bottom
JP341  STAND-OFF  [STAND-OFF]  138.94,113.03 0 top
JP342  STAND-OFF  [STAND-OFF]  159.26,113.03 0 top
JP343  I2C  [SMT-JUMPER_3_2-NC_TRACE_NO-SILK]  181.36,118.11 0 bottom
JP344  STAND-OFF  [STAND-OFF]  164.85,133.35 0 top
JP345  STAND-OFF  [STAND-OFF]  185.17,133.35 0 top
JP346  FIDUCIALUFIDUCIAL  [MICRO-FIDUCIAL]  187.07,111.12 0 top
JP347  FIDUCIALUFIDUCIAL  [MICRO-FIDUCIAL]  187.07,111.12 0 bottom
JP348  FIDUCIALUFIDUCIAL  [MICRO-FIDUCIAL]  162.94,135.25 0 top
JP349  FIDUCIALUFIDUCIAL  [MICRO-FIDUCIAL]  162.94,135.25 0 bottom
JP350  STAND-OFF  [STAND-OFF]  164.85,113.03 0 top
JP351  STAND-OFF  [STAND-OFF]  185.17,113.03 0 top
JP352  I2C  [SMT-JUMPER_3_2-NC_TRACE_NO-SILK]  207.26,118.11 0 bottom
JP353  STAND-OFF  [STAND-OFF]  190.75,133.35 0 top
JP354  STAND-OFF  [STAND-OFF]  211.07,133.35 0 top
JP355  FIDUCIALUFIDUCIAL  [MICRO-FIDUCIAL]  212.98,111.12 0 top
JP356  FIDUCIALUFIDUCIAL  [MICRO-FIDUCIAL]  212.98,111.12 0 bottom
JP357  FIDUCIALUFIDUCIAL  [MICRO-FIDUCIAL]  188.85,135.25 0 top
JP358  FIDUCIALUFIDUCIAL  [MICRO-FIDUCIAL]  188.85,135.25 0 bottom
JP359  STAND-OFF  [STAND-OFF]  190.75,113.03 0 top
JP360  STAND-OFF  [STAND-OFF]  211.07,113.03 0 top
LOGO1  OSHW-LOGOMINI  [OSHW-LOGO-MINI]  29.72,13.21 0 bottom
LOGO2  SFE_LOGO_NAME_FLAME.1_INCH  [SFE_LOGO_NAME_FLAME_.1]  25.53,26.54 0 bottom
LOGO3  SFE_LOGO_NAME.1_INCH  [SFE_LOGO_NAME_.1]  13.59,27.94 0 top
LOGO4  OSHW-LOGOMINI  [OSHW-LOGO-MINI]  55.63,13.21 0 bottom
LOGO5  SFE_LOGO_NAME_FLAME.1_INCH  [SFE_LOGO_NAME_FLAME_.1]  51.43,26.54 0 bottom
LOGO6  SFE_LOGO_NAME.1_INCH  [SFE_LOGO_NAME_.1]  39.5,27.94 0 top
LOGO7  OSHW-LOGOMINI  [OSHW-LOGO-MINI]  81.53,13.21 0 bottom
LOGO8  SFE_LOGO_NAME_FLAME.1_INCH  [SFE_LOGO_NAME_FLAME_.1]  77.34,26.54 0 bottom
LOGO9  SFE_LOGO_NAME.1_INCH  [SFE_LOGO_NAME_.1]  65.41,27.94 0 top
LOGO10  OSHW-LOGOMINI  [OSHW-LOGO-MINI]  107.44,13.21 0 bottom
LOGO11  SFE_LOGO_NAME_FLAME.1_INCH  [SFE_LOGO_NAME_FLAME_.1]  103.25,26.54 0 bottom
LOGO12  SFE_LOGO_NAME.1_INCH  [SFE_LOGO_NAME_.1]  91.31,27.94 0 top
LOGO13  OSHW-LOGOMINI  [OSHW-LOGO-MINI]  133.35,13.21 0 bottom
LOGO14  SFE_LOGO_NAME_FLAME.1_INCH  [SFE_LOGO_NAME_FLAME_.1]  129.16,26.54 0 bottom
LOGO15  SFE_LOGO_NAME.1_INCH  [SFE_LOGO_NAME_.1]  117.22,27.94 0 top
LOGO16  OSHW-LOGOMINI  [OSHW-LOGO-MINI]  159.26,13.21 0 bottom
LOGO17  SFE_LOGO_NAME_FLAME.1_INCH  [SFE_LOGO_NAME_FLAME_.1]  155.07,26.54 0 bottom
LOGO18  SFE_LOGO_NAME.1_INCH  [SFE_LOGO_NAME_.1]  143.13,27.94 0 top
LOGO19  OSHW-LOGOMINI  [OSHW-LOGO-MINI]  185.17,13.21 0 bottom
LOGO20  SFE_LOGO_NAME_FLAME.1_INCH  [SFE_LOGO_NAME_FLAME_.1]  180.97,26.54 0 bottom
LOGO21  SFE_LOGO_NAME.1_INCH  [SFE_LOGO_NAME_.1]  169.04,27.94 0 top
LOGO22  OSHW-LOGOMINI  [OSHW-LOGO-MINI]  211.07,13.21 0 bottom
LOGO23  SFE_LOGO_NAME_FLAME.1_INCH  [SFE_LOGO_NAME_FLAME_.1]  206.88,26.54 0 bottom
LOGO24  SFE_LOGO_NAME.1_INCH  [SFE_LOGO_NAME_.1]  194.94,27.94 0 top
LOGO25  OSHW-LOGOMINI  [OSHW-LOGO-MINI]  29.72,39.12 0 bottom
LOGO26  SFE_LOGO_NAME_FLAME.1_INCH  [SFE_LOGO_NAME_FLAME_.1]  25.53,52.45 0 bottom
LOGO27  SFE_LOGO_NAME.1_INCH  [SFE_LOGO_NAME_.1]  13.59,53.85 0 top
LOGO28  OSHW-LOGOMINI  [OSHW-LOGO-MINI]  55.63,39.12 0 bottom
LOGO29  SFE_LOGO_NAME_FLAME.1_INCH  [SFE_LOGO_NAME_FLAME_.1]  51.43,52.45 0 bottom
LOGO30  SFE_LOGO_NAME.1_INCH  [SFE_LOGO_NAME_.1]  39.5,53.85 0 top
LOGO31  OSHW-LOGOMINI  [OSHW-LOGO-MINI]  81.53,39.12 0 bottom
LOGO32  SFE_LOGO_NAME_FLAME.1_INCH  [SFE_LOGO_NAME_FLAME_.1]  77.34,52.45 0 bottom
LOGO33  SFE_LOGO_NAME.1_INCH  [SFE_LOGO_NAME_.1]  65.41,53.85 0 top
LOGO34  OSHW-LOGOMINI  [OSHW-LOGO-MINI]  107.44,39.12 0 bottom
LOGO35  SFE_LOGO_NAME_FLAME.1_INCH  [SFE_LOGO_NAME_FLAME_.1]  103.25,52.45 0 bottom
LOGO36  SFE_LOGO_NAME.1_INCH  [SFE_LOGO_NAME_.1]  91.31,53.85 0 top
LOGO37  OSHW-LOGOMINI  [OSHW-LOGO-MINI]  133.35,39.12 0 bottom
LOGO38  SFE_LOGO_NAME_FLAME.1_INCH  [SFE_LOGO_NAME_FLAME_.1]  129.16,52.45 0 bottom
LOGO39  SFE_LOGO_NAME.1_INCH  [SFE_LOGO_NAME_.1]  117.22,53.85 0 top
LOGO40  OSHW-LOGOMINI  [OSHW-LOGO-MINI]  159.26,39.12 0 bottom
LOGO41  SFE_LOGO_NAME_FLAME.1_INCH  [SFE_LOGO_NAME_FLAME_.1]  155.07,52.45 0 bottom
LOGO42  SFE_LOGO_NAME.1_INCH  [SFE_LOGO_NAME_.1]  143.13,53.85 0 top
LOGO43  OSHW-LOGOMINI  [OSHW-LOGO-MINI]  185.17,39.12 0 bottom
LOGO44  SFE_LOGO_NAME_FLAME.1_INCH  [SFE_LOGO_NAME_FLAME_.1]  180.97,52.45 0 bottom
LOGO45  SFE_LOGO_NAME.1_INCH  [SFE_LOGO_NAME_.1]  169.04,53.85 0 top
LOGO46  OSHW-LOGOMINI  [OSHW-LOGO-MINI]  211.07,39.12 0 bottom
LOGO47  SFE_LOGO_NAME_FLAME.1_INCH  [SFE_LOGO_NAME_FLAME_.1]  206.88,52.45 0 bottom
LOGO48  SFE_LOGO_NAME.1_INCH  [SFE_LOGO_NAME_.1]  194.94,53.85 0 top
LOGO49  OSHW-LOGOMINI  [OSHW-LOGO-MINI]  29.72,65.02 0 bottom
LOGO50  SFE_LOGO_NAME_FLAME.1_INCH  [SFE_LOGO_NAME_FLAME_.1]  25.53,78.36 0 bottom
LOGO51  SFE_LOGO_NAME.1_INCH  [SFE_LOGO_NAME_.1]  13.59,79.76 0 top
LOGO52  OSHW-LOGOMINI  [OSHW-LOGO-MINI]  55.63,65.02 0 bottom
LOGO53  SFE_LOGO_NAME_FLAME.1_INCH  [SFE_LOGO_NAME_FLAME_.1]  51.43,78.36 0 bottom
LOGO54  SFE_LOGO_NAME.1_INCH  [SFE_LOGO_NAME_.1]  39.5,79.76 0 top
LOGO55  OSHW-LOGOMINI  [OSHW-LOGO-MINI]  81.53,65.02 0 bottom
LOGO56  SFE_LOGO_NAME_FLAME.1_INCH  [SFE_LOGO_NAME_FLAME_.1]  77.34,78.36 0 bottom
LOGO57  SFE_LOGO_NAME.1_INCH  [SFE_LOGO_NAME_.1]  65.41,79.76 0 top
LOGO58  OSHW-LOGOMINI  [OSHW-LOGO-MINI]  107.44,65.02 0 bottom
LOGO59  SFE_LOGO_NAME_FLAME.1_INCH  [SFE_LOGO_NAME_FLAME_.1]  103.25,78.36 0 bottom
LOGO60  SFE_LOGO_NAME.1_INCH  [SFE_LOGO_NAME_.1]  91.31,79.76 0 top
LOGO61  OSHW-LOGOMINI  [OSHW-LOGO-MINI]  133.35,65.02 0 bottom
LOGO62  SFE_LOGO_NAME_FLAME.1_INCH  [SFE_LOGO_NAME_FLAME_.1]  129.16,78.36 0 bottom
LOGO63  SFE_LOGO_NAME.1_INCH  [SFE_LOGO_NAME_.1]  117.22,79.76 0 top
LOGO64  OSHW-LOGOMINI  [OSHW-LOGO-MINI]  159.26,65.02 0 bottom
LOGO65  SFE_LOGO_NAME_FLAME.1_INCH  [SFE_LOGO_NAME_FLAME_.1]  155.07,78.36 0 bottom
LOGO66  SFE_LOGO_NAME.1_INCH  [SFE_LOGO_NAME_.1]  143.13,79.76 0 top
LOGO67  OSHW-LOGOMINI  [OSHW-LOGO-MINI]  185.17,65.02 0 bottom
LOGO68  SFE_LOGO_NAME_FLAME.1_INCH  [SFE_LOGO_NAME_FLAME_.1]  180.97,78.36 0 bottom
LOGO69  SFE_LOGO_NAME.1_INCH  [SFE_LOGO_NAME_.1]  169.04,79.76 0 top
LOGO70  OSHW-LOGOMINI  [OSHW-LOGO-MINI]  211.07,65.02 0 bottom
LOGO71  SFE_LOGO_NAME_FLAME.1_INCH  [SFE_LOGO_NAME_FLAME_.1]  206.88,78.36 0 bottom
LOGO72  SFE_LOGO_NAME.1_INCH  [SFE_LOGO_NAME_.1]  194.94,79.76 0 top
LOGO73  OSHW-LOGOMINI  [OSHW-LOGO-MINI]  29.72,90.93 0 bottom
LOGO74  SFE_LOGO_NAME_FLAME.1_INCH  [SFE_LOGO_NAME_FLAME_.1]  25.53,104.27 0 bottom
LOGO75  SFE_LOGO_NAME.1_INCH  [SFE_LOGO_NAME_.1]  13.59,105.66 0 top
LOGO76  OSHW-LOGOMINI  [OSHW-LOGO-MINI]  55.63,90.93 0 bottom
LOGO77  SFE_LOGO_NAME_FLAME.1_INCH  [SFE_LOGO_NAME_FLAME_.1]  51.43,104.27 0 bottom
LOGO78  SFE_LOGO_NAME.1_INCH  [SFE_LOGO_NAME_.1]  39.5,105.66 0 top
LOGO79  OSHW-LOGOMINI  [OSHW-LOGO-MINI]  81.53,90.93 0 bottom
LOGO80  SFE_LOGO_NAME_FLAME.1_INCH  [SFE_LOGO_NAME_FLAME_.1]  77.34,104.27 0 bottom
LOGO81  SFE_LOGO_NAME.1_INCH  [SFE_LOGO_NAME_.1]  65.41,105.66 0 top
LOGO82  OSHW-LOGOMINI  [OSHW-LOGO-MINI]  107.44,90.93 0 bottom
LOGO83  SFE_LOGO_NAME_FLAME.1_INCH  [SFE_LOGO_NAME_FLAME_.1]  103.25,104.27 0 bottom
LOGO84  SFE_LOGO_NAME.1_INCH  [SFE_LOGO_NAME_.1]  91.31,105.66 0 top
LOGO85  OSHW-LOGOMINI  [OSHW-LOGO-MINI]  133.35,90.93 0 bottom
LOGO86  SFE_LOGO_NAME_FLAME.1_INCH  [SFE_LOGO_NAME_FLAME_.1]  129.16,104.27 0 bottom
LOGO87  SFE_LOGO_NAME.1_INCH  [SFE_LOGO_NAME_.1]  117.22,105.66 0 top
LOGO88  OSHW-LOGOMINI  [OSHW-LOGO-MINI]  159.26,90.93 0 bottom
LOGO89  SFE_LOGO_NAME_FLAME.1_INCH  [SFE_LOGO_NAME_FLAME_.1]  155.07,104.27 0 bottom
LOGO90  SFE_LOGO_NAME.1_INCH  [SFE_LOGO_NAME_.1]  143.13,105.66 0 top
LOGO91  OSHW-LOGOMINI  [OSHW-LOGO-MINI]  185.17,90.93 0 bottom
LOGO92  SFE_LOGO_NAME_FLAME.1_INCH  [SFE_LOGO_NAME_FLAME_.1]  180.97,104.27 0 bottom
LOGO93  SFE_LOGO_NAME.1_INCH  [SFE_LOGO_NAME_.1]  169.04,105.66 0 top
LOGO94  OSHW-LOGOMINI  [OSHW-LOGO-MINI]  211.07,90.93 0 bottom
LOGO95  SFE_LOGO_NAME_FLAME.1_INCH  [SFE_LOGO_NAME_FLAME_.1]  206.88,104.27 0 bottom
LOGO96  SFE_LOGO_NAME.1_INCH  [SFE_LOGO_NAME_.1]  194.94,105.66 0 top
LOGO97  OSHW-LOGOMINI  [OSHW-LOGO-MINI]  29.72,116.84 0 bottom
LOGO98  SFE_LOGO_NAME_FLAME.1_INCH  [SFE_LOGO_NAME_FLAME_.1]  25.53,130.17 0 bottom
LOGO99  SFE_LOGO_NAME.1_INCH  [SFE_LOGO_NAME_.1]  13.59,131.57 0 top
LOGO100  OSHW-LOGOMINI  [OSHW-LOGO-MINI]  55.63,116.84 0 bottom
LOGO101  SFE_LOGO_NAME_FLAME.1_INCH  [SFE_LOGO_NAME_FLAME_.1]  51.43,130.17 0 bottom
LOGO102  SFE_LOGO_NAME.1_INCH  [SFE_LOGO_NAME_.1]  39.5,131.57 0 top
LOGO103  OSHW-LOGOMINI  [OSHW-LOGO-MINI]  81.53,116.84 0 bottom
LOGO104  SFE_LOGO_NAME_FLAME.1_INCH  [SFE_LOGO_NAME_FLAME_.1]  77.34,130.17 0 bottom
LOGO105  SFE_LOGO_NAME.1_INCH  [SFE_LOGO_NAME_.1]  65.41,131.57 0 top
LOGO106  OSHW-LOGOMINI  [OSHW-LOGO-MINI]  107.44,116.84 0 bottom
LOGO107  SFE_LOGO_NAME_FLAME.1_INCH  [SFE_LOGO_NAME_FLAME_.1]  103.25,130.17 0 bottom
LOGO108  SFE_LOGO_NAME.1_INCH  [SFE_LOGO_NAME_.1]  91.31,131.57 0 top
LOGO109  OSHW-LOGOMINI  [OSHW-LOGO-MINI]  133.35,116.84 0 bottom
LOGO110  SFE_LOGO_NAME_FLAME.1_INCH  [SFE_LOGO_NAME_FLAME_.1]  129.16,130.17 0 bottom
LOGO111  SFE_LOGO_NAME.1_INCH  [SFE_LOGO_NAME_.1]  117.22,131.57 0 top
LOGO112  OSHW-LOGOMINI  [OSHW-LOGO-MINI]  159.26,116.84 0 bottom
LOGO113  SFE_LOGO_NAME_FLAME.1_INCH  [SFE_LOGO_NAME_FLAME_.1]  155.07,130.17 0 bottom
LOGO114  SFE_LOGO_NAME.1_INCH  [SFE_LOGO_NAME_.1]  143.13,131.57 0 top
LOGO115  OSHW-LOGOMINI  [OSHW-LOGO-MINI]  185.17,116.84 0 bottom
LOGO116  SFE_LOGO_NAME_FLAME.1_INCH  [SFE_LOGO_NAME_FLAME_.1]  180.97,130.17 0 bottom
LOGO117  SFE_LOGO_NAME.1_INCH  [SFE_LOGO_NAME_.1]  169.04,131.57 0 top
LOGO118  OSHW-LOGOMINI  [OSHW-LOGO-MINI]  211.07,116.84 0 bottom
LOGO119  SFE_LOGO_NAME_FLAME.1_INCH  [SFE_LOGO_NAME_FLAME_.1]  206.88,130.17 0 bottom
LOGO120  SFE_LOGO_NAME.1_INCH  [SFE_LOGO_NAME_.1]  194.94,131.57 0 top
R1  2.2k  [0603]  24.64,14.48 90 top
R2  2.2k  [0603]  27.18,14.48 90 top
R3  1k  [0603]  9.4,15.11 0 top
R4  2.2k  [0603]  50.55,14.48 90 top
R5  2.2k  [0603]  53.09,14.48 90 top
R6  1k  [0603]  35.31,15.11 0 top
R7  2.2k  [0603]  76.45,14.48 90 top
R8  2.2k  [0603]  78.99,14.48 90 top
R9  1k  [0603]  61.21,15.11 0 top
R10  2.2k  [0603]  102.36,14.48 90 top
R11  2.2k  [0603]  104.9,14.48 90 top
R12  1k  [0603]  87.12,15.11 0 top
R13  2.2k  [0603]  128.27,14.48 90 top
R14  2.2k  [0603]  130.81,14.48 90 top
R15  1k  [0603]  113.03,15.11 0 top
R16  2.2k  [0603]  154.18,14.48 90 top
R17  2.2k  [0603]  156.72,14.48 90 top
R18  1k  [0603]  138.94,15.11 0 top
R19  2.2k  [0603]  180.09,14.48 90 top
R20  2.2k  [0603]  182.63,14.48 90 top
R21  1k  [0603]  164.85,15.11 0 top
R22  2.2k  [0603]  205.99,14.48 90 top
R23  2.2k  [0603]  208.53,14.48 90 top
R24  1k  [0603]  190.75,15.11 0 top
R25  2.2k  [0603]  24.64,40.39 90 top
R26  2.2k  [0603]  27.18,40.39 90 top
R27  1k  [0603]  9.4,41.02 0 top
R28  2.2k  [0603]  50.55,40.39 90 top
R29  2.2k  [0603]  53.09,40.39 90 top
R30  1k  [0603]  35.31,41.02 0 top
R31  2.2k  [0603]  76.45,40.39 90 top
R32  2.2k  [0603]  78.99,40.39 90 top
R33  1k  [0603]  61.21,41.02 0 top
R34  2.2k  [0603]  102.36,40.39 90 top
R35  2.2k  [0603]  104.9,40.39 90 top
R36  1k  [0603]  87.12,41.02 0 top
R37  2.2k  [0603]  128.27,40.39 90 top
R38  2.2k  [0603]  130.81,40.39 90 top
R39  1k  [0603]  113.03,41.02 0 top
R40  2.2k  [0603]  154.18,40.39 90 top
R41  2.2k  [0603]  156.72,40.39 90 top
R42  1k  [0603]  138.94,41.02 0 top
R43  2.2k  [0603]  180.09,40.39 90 top
R44  2.2k  [0603]  182.63,40.39 90 top
R45  1k  [0603]  164.85,41.02 0 top
R46  2.2k  [0603]  205.99,40.39 90 top
R47  2.2k  [0603]  208.53,40.39 90 top
R48  1k  [0603]  190.75,41.02 0 top
R49  2.2k  [0603]  24.64,66.29 90 top
R50  2.2k  [0603]  27.18,66.29 90 top
R51  1k  [0603]  9.4,66.93 0 top
R52  2.2k  [0603]  50.55,66.29 90 top
R53  2.2k  [0603]  53.09,66.29 90 top
R54  1k  [0603]  35.31,66.93 0 top
R55  2.2k  [0603]  76.45,66.29 90 top
R56  2.2k  [0603]  78.99,66.29 90 top
R57  1k  [0603]  61.21,66.93 0 top
R58  2.2k  [0603]  102.36,66.29 90 top
R59  2.2k  [0603]  104.9,66.29 90 top
R60  1k  [0603]  87.12,66.93 0 top
R61  2.2k  [0603]  128.27,66.29 90 top
R62  2.2k  [0603]  130.81,66.29 90 top
R63  1k  [0603]  113.03,66.93 0 top
R64  2.2k  [0603]  154.18,66.29 90 top
R65  2.2k  [0603]  156.72,66.29 90 top
R66  1k  [0603]  138.94,66.93 0 top
R67  2.2k  [0603]  180.09,66.29 90 top
R68  2.2k  [0603]  182.63,66.29 90 top
R69  1k  [0603]  164.85,66.93 0 top
R70  2.2k  [0603]  205.99,66.29 90 top
R71  2.2k  [0603]  208.53,66.29 90 top
R72  1k  [0603]  190.75,66.93 0 top
R73  2.2k  [0603]  24.64,92.2 90 top
R74  2.2k  [0603]  27.18,92.2 90 top
R75  1k  [0603]  9.4,92.84 0 top
R76  2.2k  [0603]  50.55,92.2 90 top
R77  2.2k  [0603]  53.09,92.2 90 top
R78  1k  [0603]  35.31,92.84 0 top
R79  2.2k  [0603]  76.45,92.2 90 top
R80  2.2k  [0603]  78.99,92.2 90 top
R81  1k  [0603]  61.21,92.84 0 top
R82  2.2k  [0603]  102.36,92.2 90 top
R83  2.2k  [0603]  104.9,92.2 90 top
R84  1k  [0603]  87.12,92.84 0 top
R85  2.2k  [0603]  128.27,92.2 90 top
R86  2.2k  [0603]  130.81,92.2 90 top
R87  1k  [0603]  113.03,92.84 0 top
R88  2.2k  [0603]  154.18,92.2 90 top
R89  2.2k  [0603]  156.72,92.2 90 top
R90  1k  [0603]  138.94,92.84 0 top
R91  2.2k  [0603]  180.09,92.2 90 top
R92  2.2k  [0603]  182.63,92.2 90 top
R93  1k  [0603]  164.85,92.84 0 top
R94  2.2k  [0603]  205.99,92.2 90 top
R95  2.2k  [0603]  208.53,92.2 90 top
R96  1k  [0603]  190.75,92.84 0 top
R97  2.2k  [0603]  24.64,118.11 90 top
R98  2.2k  [0603]  27.18,118.11 90 top
R99  1k  [0603]  9.4,118.75 0 top
R100  2.2k  [0603]  50.55,118.11 90 top
R101  2.2k  [0603]  53.09,118.11 90 top
R102  1k  [0603]  35.31,118.75 0 top
R103  2.2k  [0603]  76.45,118.11 90 top
R104  2.2k  [0603]  78.99,118.11 90 top
R105  1k  [0603]  61.21,118.75 0 top
R106  2.2k  [0603]  102.36,118.11 90 top
R107  2.2k  [0603]  104.9,118.11 90 top
R108  1k  [0603]  87.12,118.75 0 top
R109  2.2k  [0603]  128.27,118.11 90 top
R110  2.2k  [0603]  130.81,118.11 90 top
R111  1k  [0603]  113.03,118.75 0 top
R112  2.2k  [0603]  154.18,118.11 90 top
R113  2.2k  [0603]  156.72,118.11 90 top
R114  1k  [0603]  138.94,118.75 0 top
R115  2.2k  [0603]  180.09,118.11 90 top
R116  2.2k  [0603]  182.63,118.11 90 top
R117  1k  [0603]  164.85,118.75 0 top
R118  2.2k  [0603]  205.99,118.11 90 top
R119  2.2k  [0603]  208.53,118.11 90 top
R120  1k  [0603]  190.75,118.75 0 top
U1  110DEG  [MLX90540_MLX90640]  19.56,19.56 90 top
U2  110DEG  [MLX90540_MLX90640]  45.47,19.56 90 top
U3  110DEG  [MLX90540_MLX90640]  71.37,19.56 90 top
U4  110DEG  [MLX90540_MLX90640]  97.28,19.56 90 top
U5  110DEG  [MLX90540_MLX90640]  123.19,19.56 90 top
U6  110DEG  [MLX90540_MLX90640]  149.1,19.56 90 top
U7  110DEG  [MLX90540_MLX90640]  175.01,19.56 90 top
U8  110DEG  [MLX90540_MLX90640]  200.91,19.56 90 top
U9  110DEG  [MLX90540_MLX90640]  19.56,45.47 90 top
U10  110DEG  [MLX90540_MLX90640]  45.47,45.47 90 top
U11  110DEG  [MLX90540_MLX90640]  71.37,45.47 90 top
U12  110DEG  [MLX90540_MLX90640]  97.28,45.47 90 top
U13  110DEG  [MLX90540_MLX90640]  123.19,45.47 90 top
U14  110DEG  [MLX90540_MLX90640]  149.1,45.47 90 top
U15  110DEG  [MLX90540_MLX90640]  175.01,45.47 90 top
U16  110DEG  [MLX90540_MLX90640]  200.91,45.47 90 top
U17  110DEG  [MLX90540_MLX90640]  19.56,71.37 90 top
U18  110DEG  [MLX90540_MLX90640]  45.47,71.37 90 top
U19  110DEG  [MLX90540_MLX90640]  71.37,71.37 90 top
U20  110DEG  [MLX90540_MLX90640]  97.28,71.37 90 top
U21  110DEG  [MLX90540_MLX90640]  123.19,71.37 90 top
U22  110DEG  [MLX90540_MLX90640]  149.1,71.37 90 top
U23  110DEG  [MLX90540_MLX90640]  175.01,71.37 90 top
U24  110DEG  [MLX90540_MLX90640]  200.91,71.37 90 top
U25  110DEG  [MLX90540_MLX90640]  19.56,97.28 90 top
U26  110DEG  [MLX90540_MLX90640]  45.47,97.28 90 top
U27  110DEG  [MLX90540_MLX90640]  71.37,97.28 90 top
U28  110DEG  [MLX90540_MLX90640]  97.28,97.28 90 top
U29  110DEG  [MLX90540_MLX90640]  123.19,97.28 90 top
U30  110DEG  [MLX90540_MLX90640]  149.1,97.28 90 top
U31  110DEG  [MLX90540_MLX90640]  175.01,97.28 90 top
U32  110DEG  [MLX90540_MLX90640]  200.91,97.28 90 top
U33  110DEG  [MLX90540_MLX90640]  19.56,123.19 90 top
U34  110DEG  [MLX90540_MLX90640]  45.47,123.19 90 top
U35  110DEG  [MLX90540_MLX90640]  71.37,123.19 90 top
U36  110DEG  [MLX90540_MLX90640]  97.28,123.19 90 top
U37  110DEG  [MLX90540_MLX90640]  123.19,123.19 90 top
U38  110DEG  [MLX90540_MLX90640]  149.1,123.19 90 top
U39  110DEG  [MLX90540_MLX90640]  175.01,123.19 90 top
U40  110DEG  [MLX90540_MLX90640]  200.91,123.19 90 top
U$1  [SDA-[)]  20.83,8.38 90 top
U$2  [110X75#____0]  26.29,24.64 0 top
U$3  [SDA-[)]  46.74,8.38 90 top
U$4  [SCL-[)]  23.37,8.38 90 top
U$5  [3.3V]  18.29,8.38 90 top
U$6  [GND-04]  15.75,8.38 90 top
U$7  [SDA-[)]  20.83,8.38 90 bottom
U$8  [SCL-[)]  23.37,8.38 90 bottom
U$9  [3.3V]  18.29,8.38 90 bottom
U$10  [GND-04]  15.75,8.38 90 bottom
U$11  [QWIIC-LOGO-SMALL]  9.4,13.65 0 bottom
U$12  [PWR-()-03]  7.56,12.38 0 top
U$13  [MLX906401]  13.84,25.59 0 top
U$14  [QWIIC_IR_ARRAY0]  12.19,27.5 0 top
U$15  [SCL-[)]  49.28,8.38 90 top
U$16  [I_SUPER2_C-()-03]  27.37,13.08 0 bottom
U$17  [3.3V]  44.2,8.38 90 top
U$18  [GND-04]  41.66,8.38 90 top
U$19  [SDA-[)]  46.74,8.38 90 bottom
U$20  [SCL-[)]  49.28,8.38 90 bottom
U$21  [3.3V]  44.2,8.38 90 bottom
U$22  [GND-04]  41.66,8.38 90 bottom
U$23  [QWIIC-LOGO-SMALL]  35.31,13.65 0 bottom
U$24  [PWR-()-03]  33.46,12.38 0 top
U$25  [MLX906401]  39.75,25.59 0 top
U$26  [QWIIC_IR_ARRAY0]  38.1,27.5 0 top
U$27  [I_SUPER2_C-()-03]  53.28,13.08 0 bottom
U$28  [110X75#____0]  52.2,24.64 0 top
U$29  [SDA-[)]  72.64,8.38 90 top
U$30  [SCL-[)]  75.18,8.38 90 top
U$31  [3.3V]  70.1,8.38 90 top
U$32  [GND-04]  67.56,8.38 90 top
U$33  [SDA-[)]  72.64,8.38 90 bottom
U$34  [SCL-[)]  75.18,8.38 90 bottom
U$35  [3.3V]  70.1,8.38 90 bottom
U$36  [GND-04]  67.56,8.38 90 bottom
U$37  [QWIIC-LOGO-SMALL]  61.21,13.65 0 bottom
U$38  [PWR-()-03]  59.37,12.38 0 top
U$39  [MLX906401]  65.66,25.59 0 top
U$40  [QWIIC_IR_ARRAY0]  64.01,27.5 0 top
U$41  [I_SUPER2_C-()-03]  79.18,13.08 0 bottom
U$42  [110X75#____0]  78.11,24.64 0 top
U$43  [SDA-[)]  98.55,8.38 90 top
U$44  [SCL-[)]  101.09,8.38 90 top
U$45  [3.3V]  96.01,8.38 90 top
U$46  [GND-04]  93.47,8.38 90 top
U$47  [SDA-[)]  98.55,8.38 90 bottom
U$48  [SCL-[)]  101.09,8.38 90 bottom
U$49  [3.3V]  96.01,8.38 90 bottom
U$50  [GND-04]  93.47,8.38 90 bottom
U$51  [QWIIC-LOGO-SMALL]  87.12,13.65 0 bottom
U$52  [PWR-()-03]  85.28,12.38 0 top
U$53  [MLX906401]  91.57,25.59 0 top
U$54  [QWIIC_IR_ARRAY0]  89.92,27.5 0 top
U$55  [I_SUPER2_C-()-03]  105.09,13.08 0 bottom
U$56  [110X75#____0]  104.01,24.64 0 top
U$57  [SDA-[)]  124.46,8.38 90 top
U$58  [SCL-[)]  127,8.38 90 top
U$59  [3.3V]  121.92,8.38 90 top
U$60  [GND-04]  119.38,8.38 90 top
U$61  [SDA-[)]  124.46,8.38 90 bottom